# Altium PCB GPSR_v3.PcbDoc (part 1 of 2)
Units mil, origin at the board's own origin, x right, y up, seen from the top; angles counter-clockwise.
Board outline 2716.54 x 2700.39 mil, 4 copper layers (Top, GND2, VCC3, Bottom), stack 30.8 mil thick; 185 components, 126 nets, 538 pads, 295 vias.
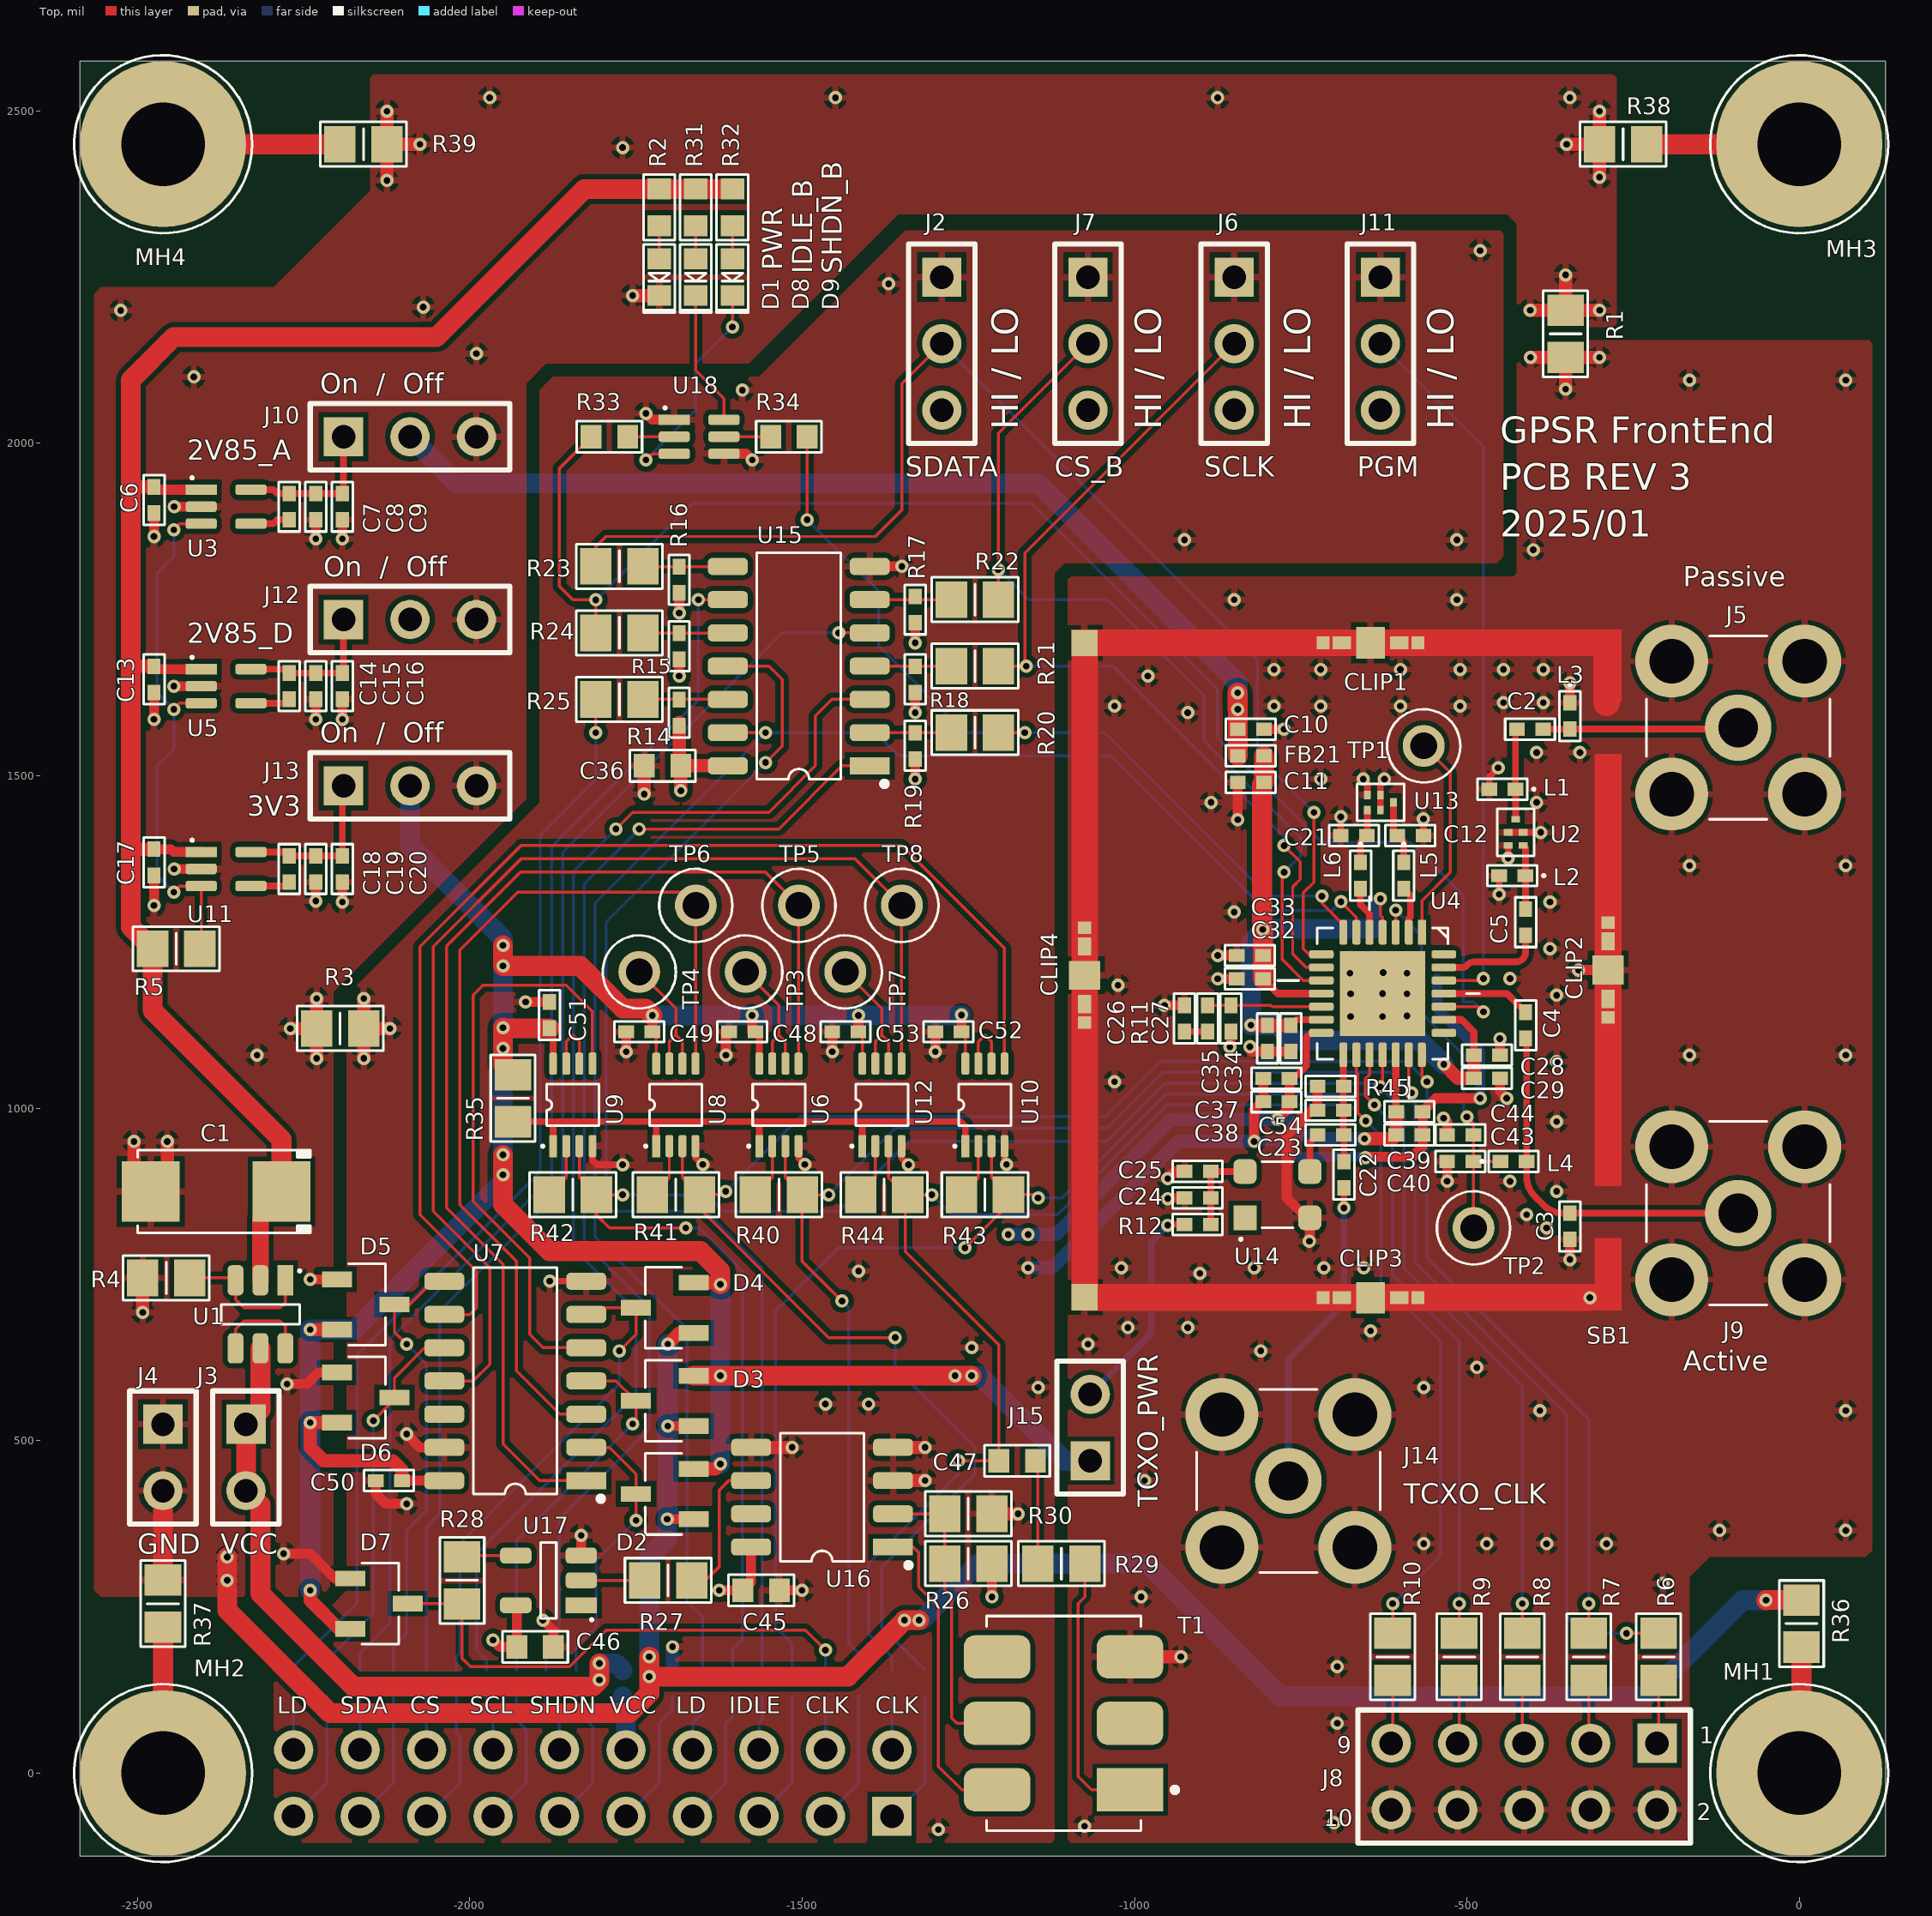
[diagram p0: Top view]
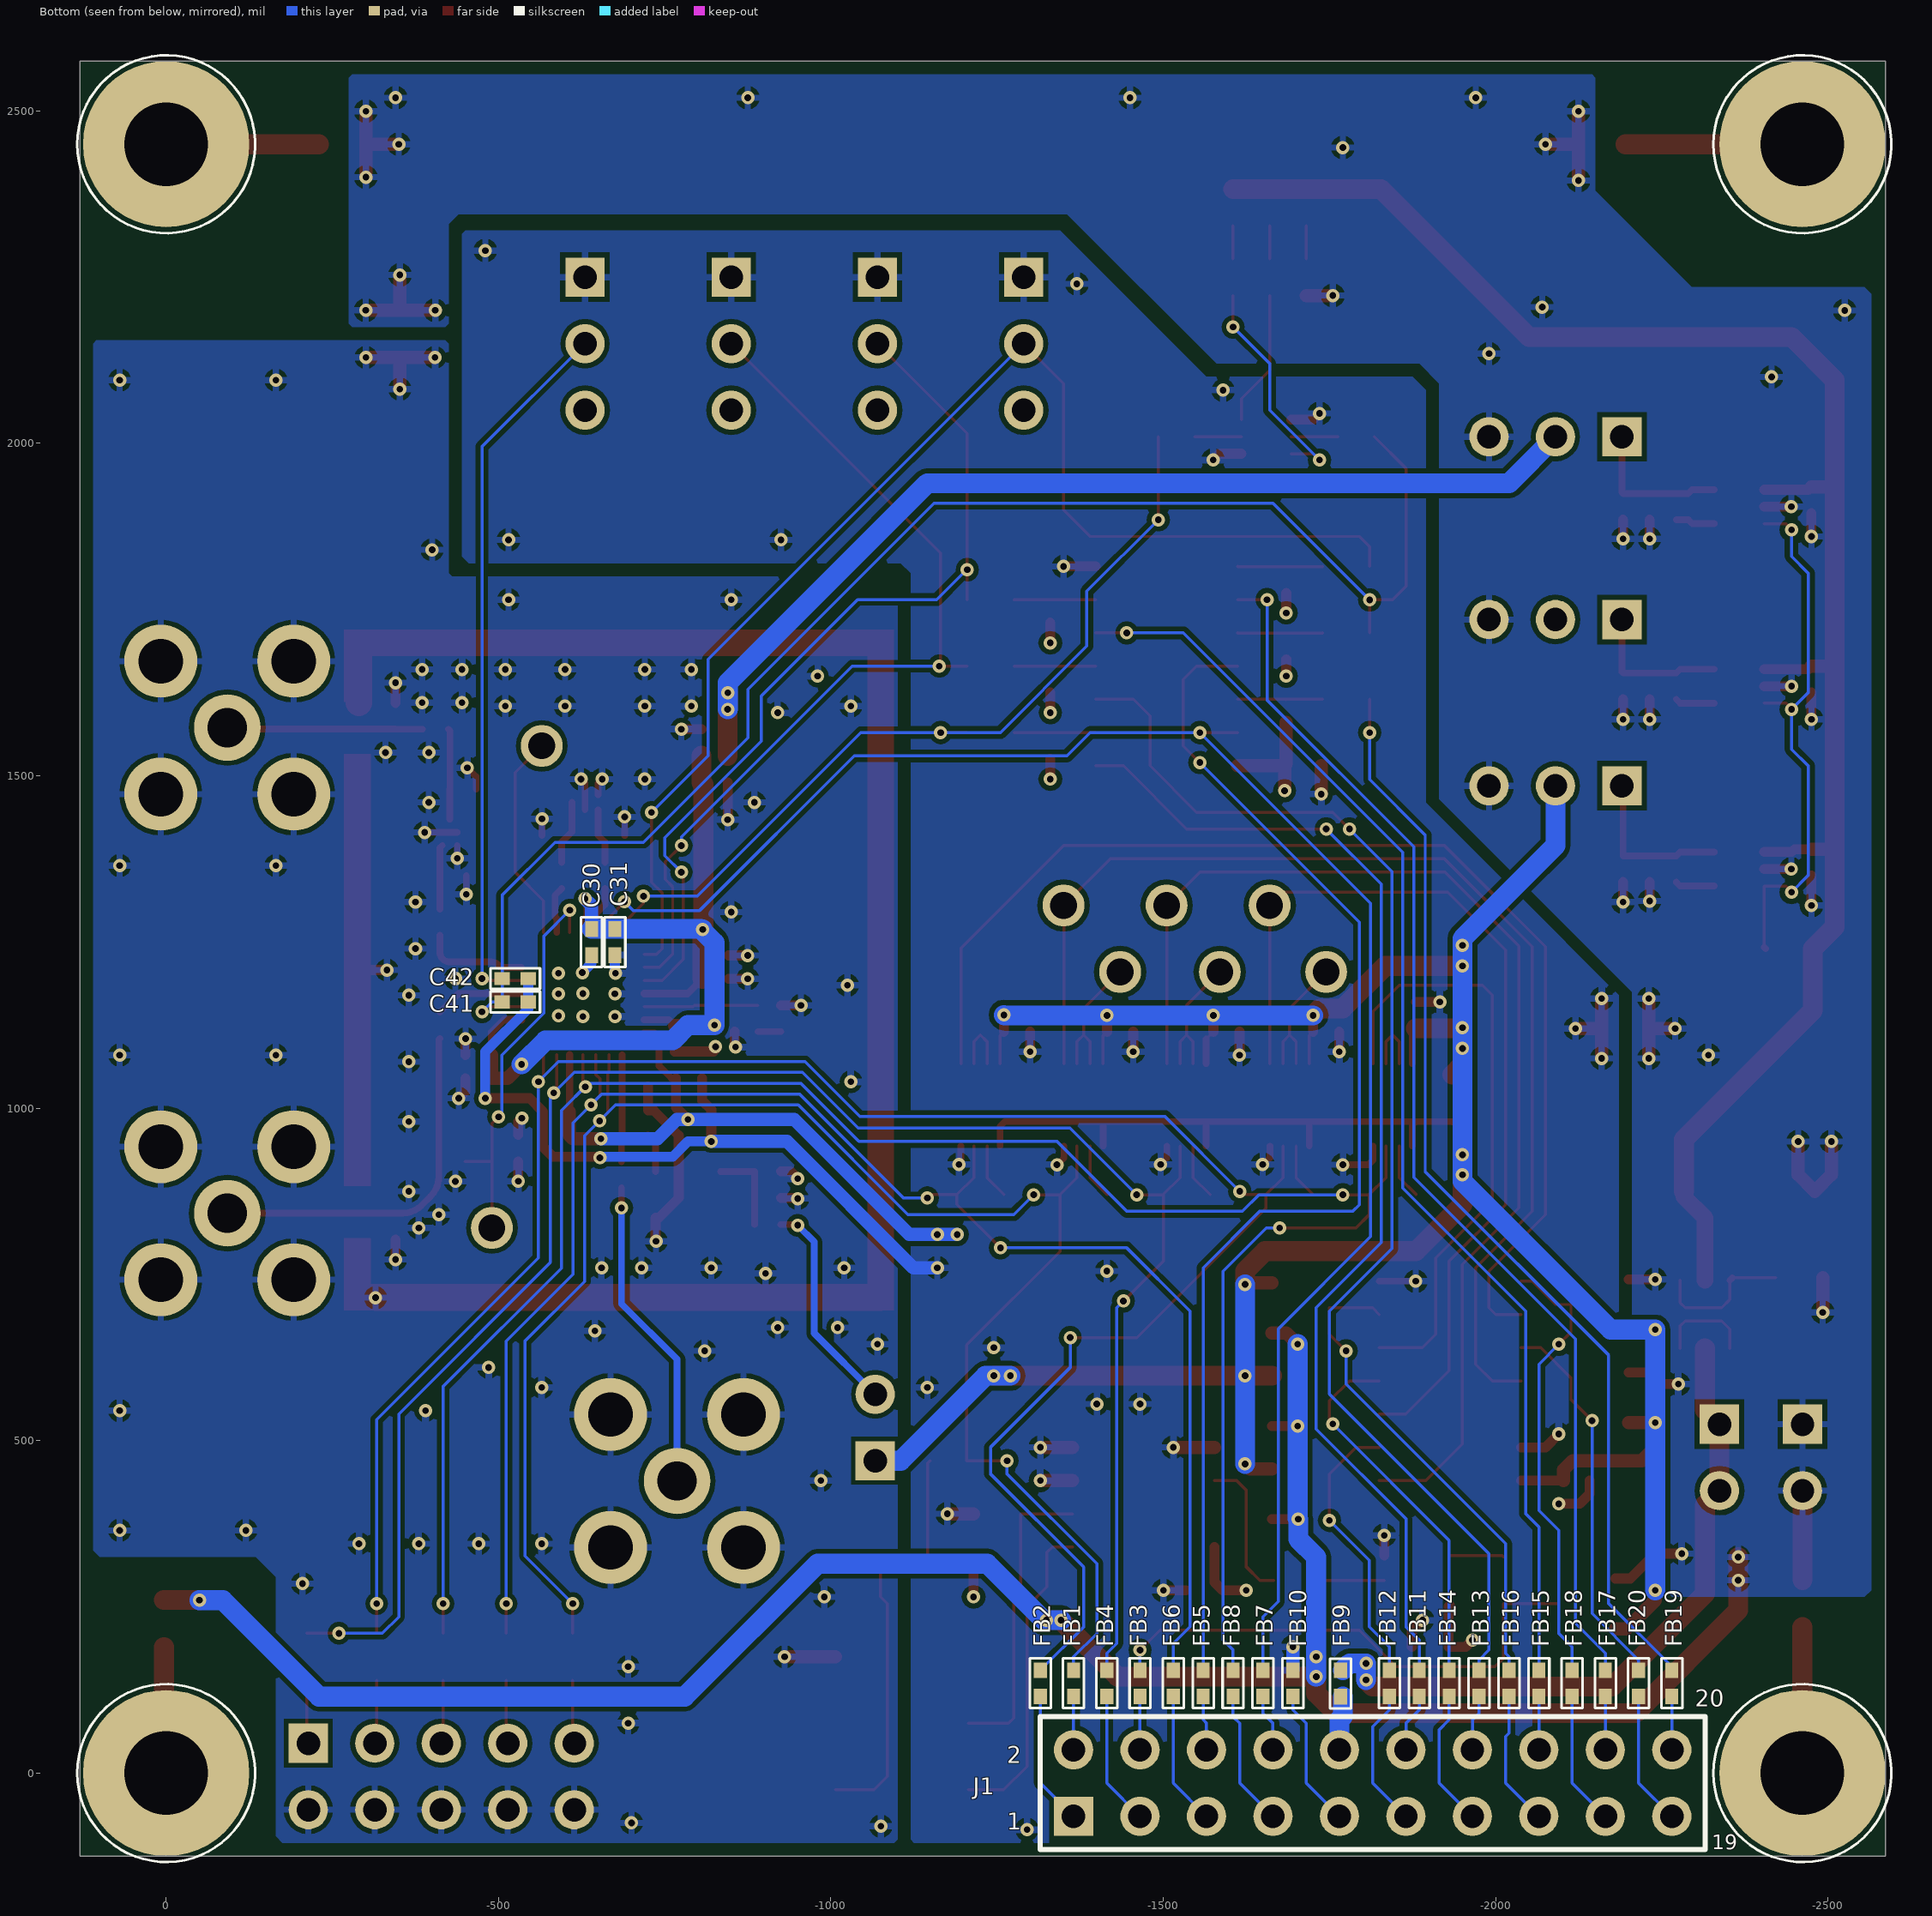
[diagram p1: Bottom view, seen from below]
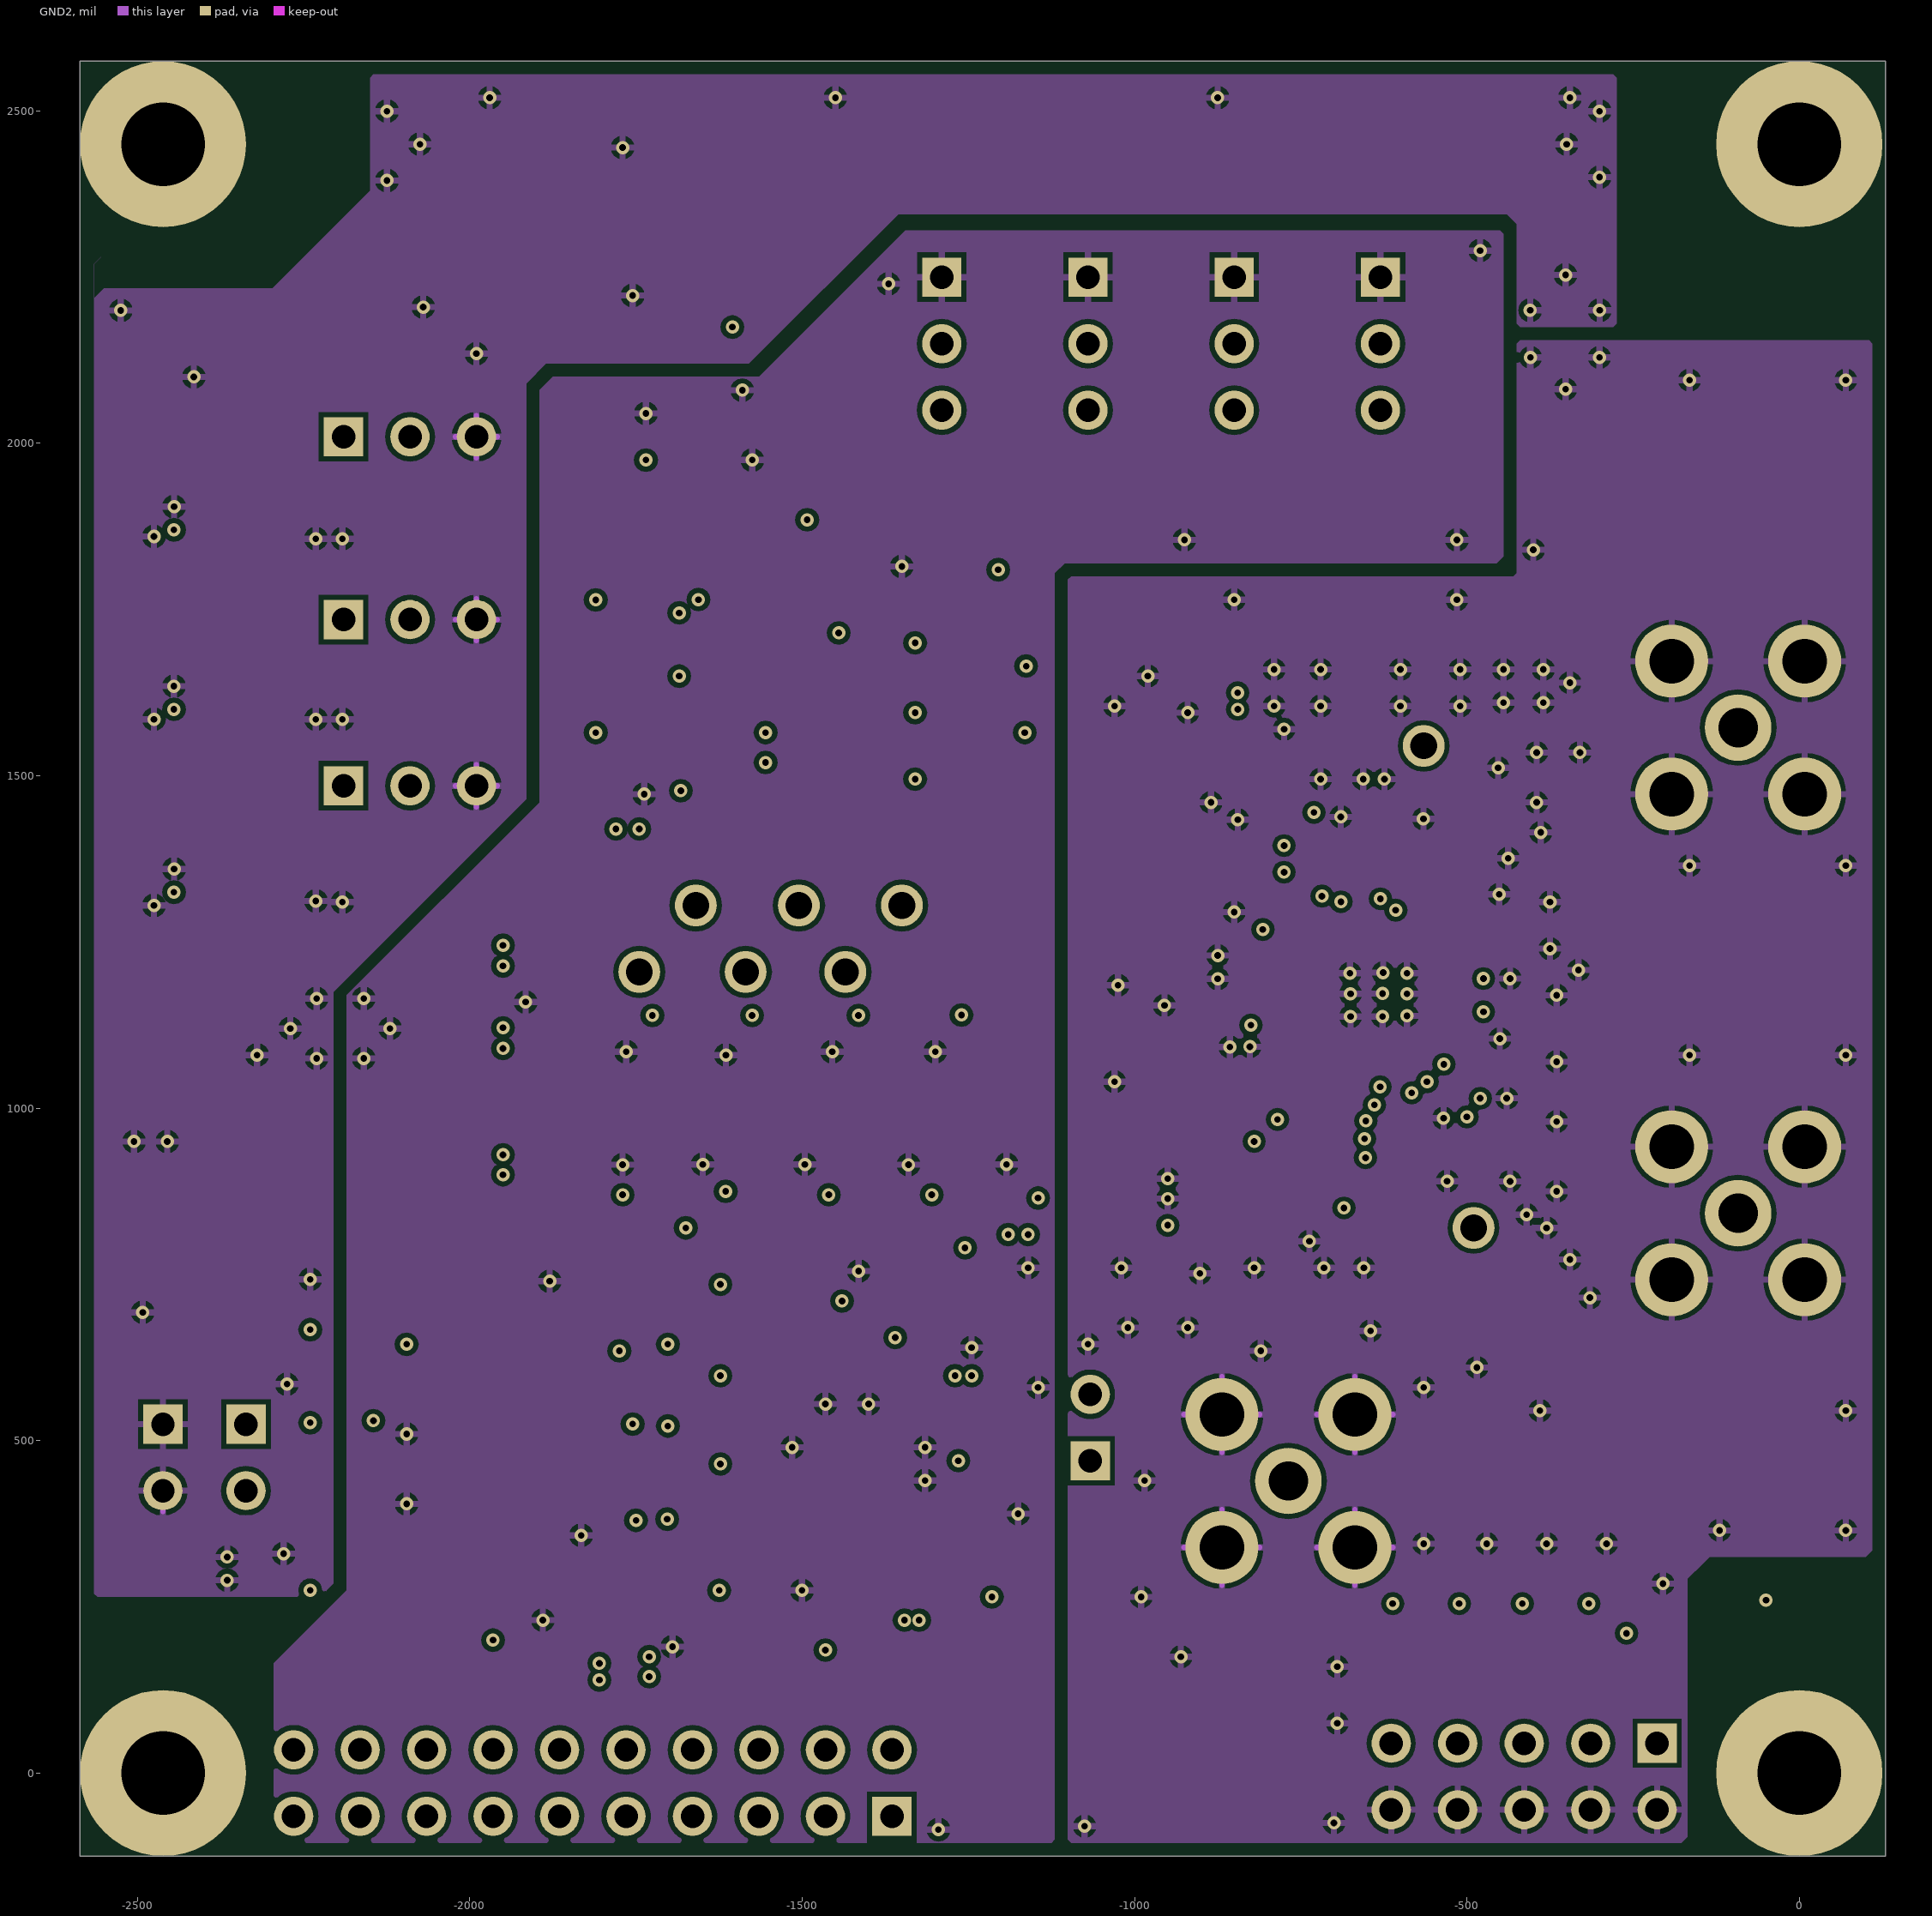
[diagram p2: GND2]
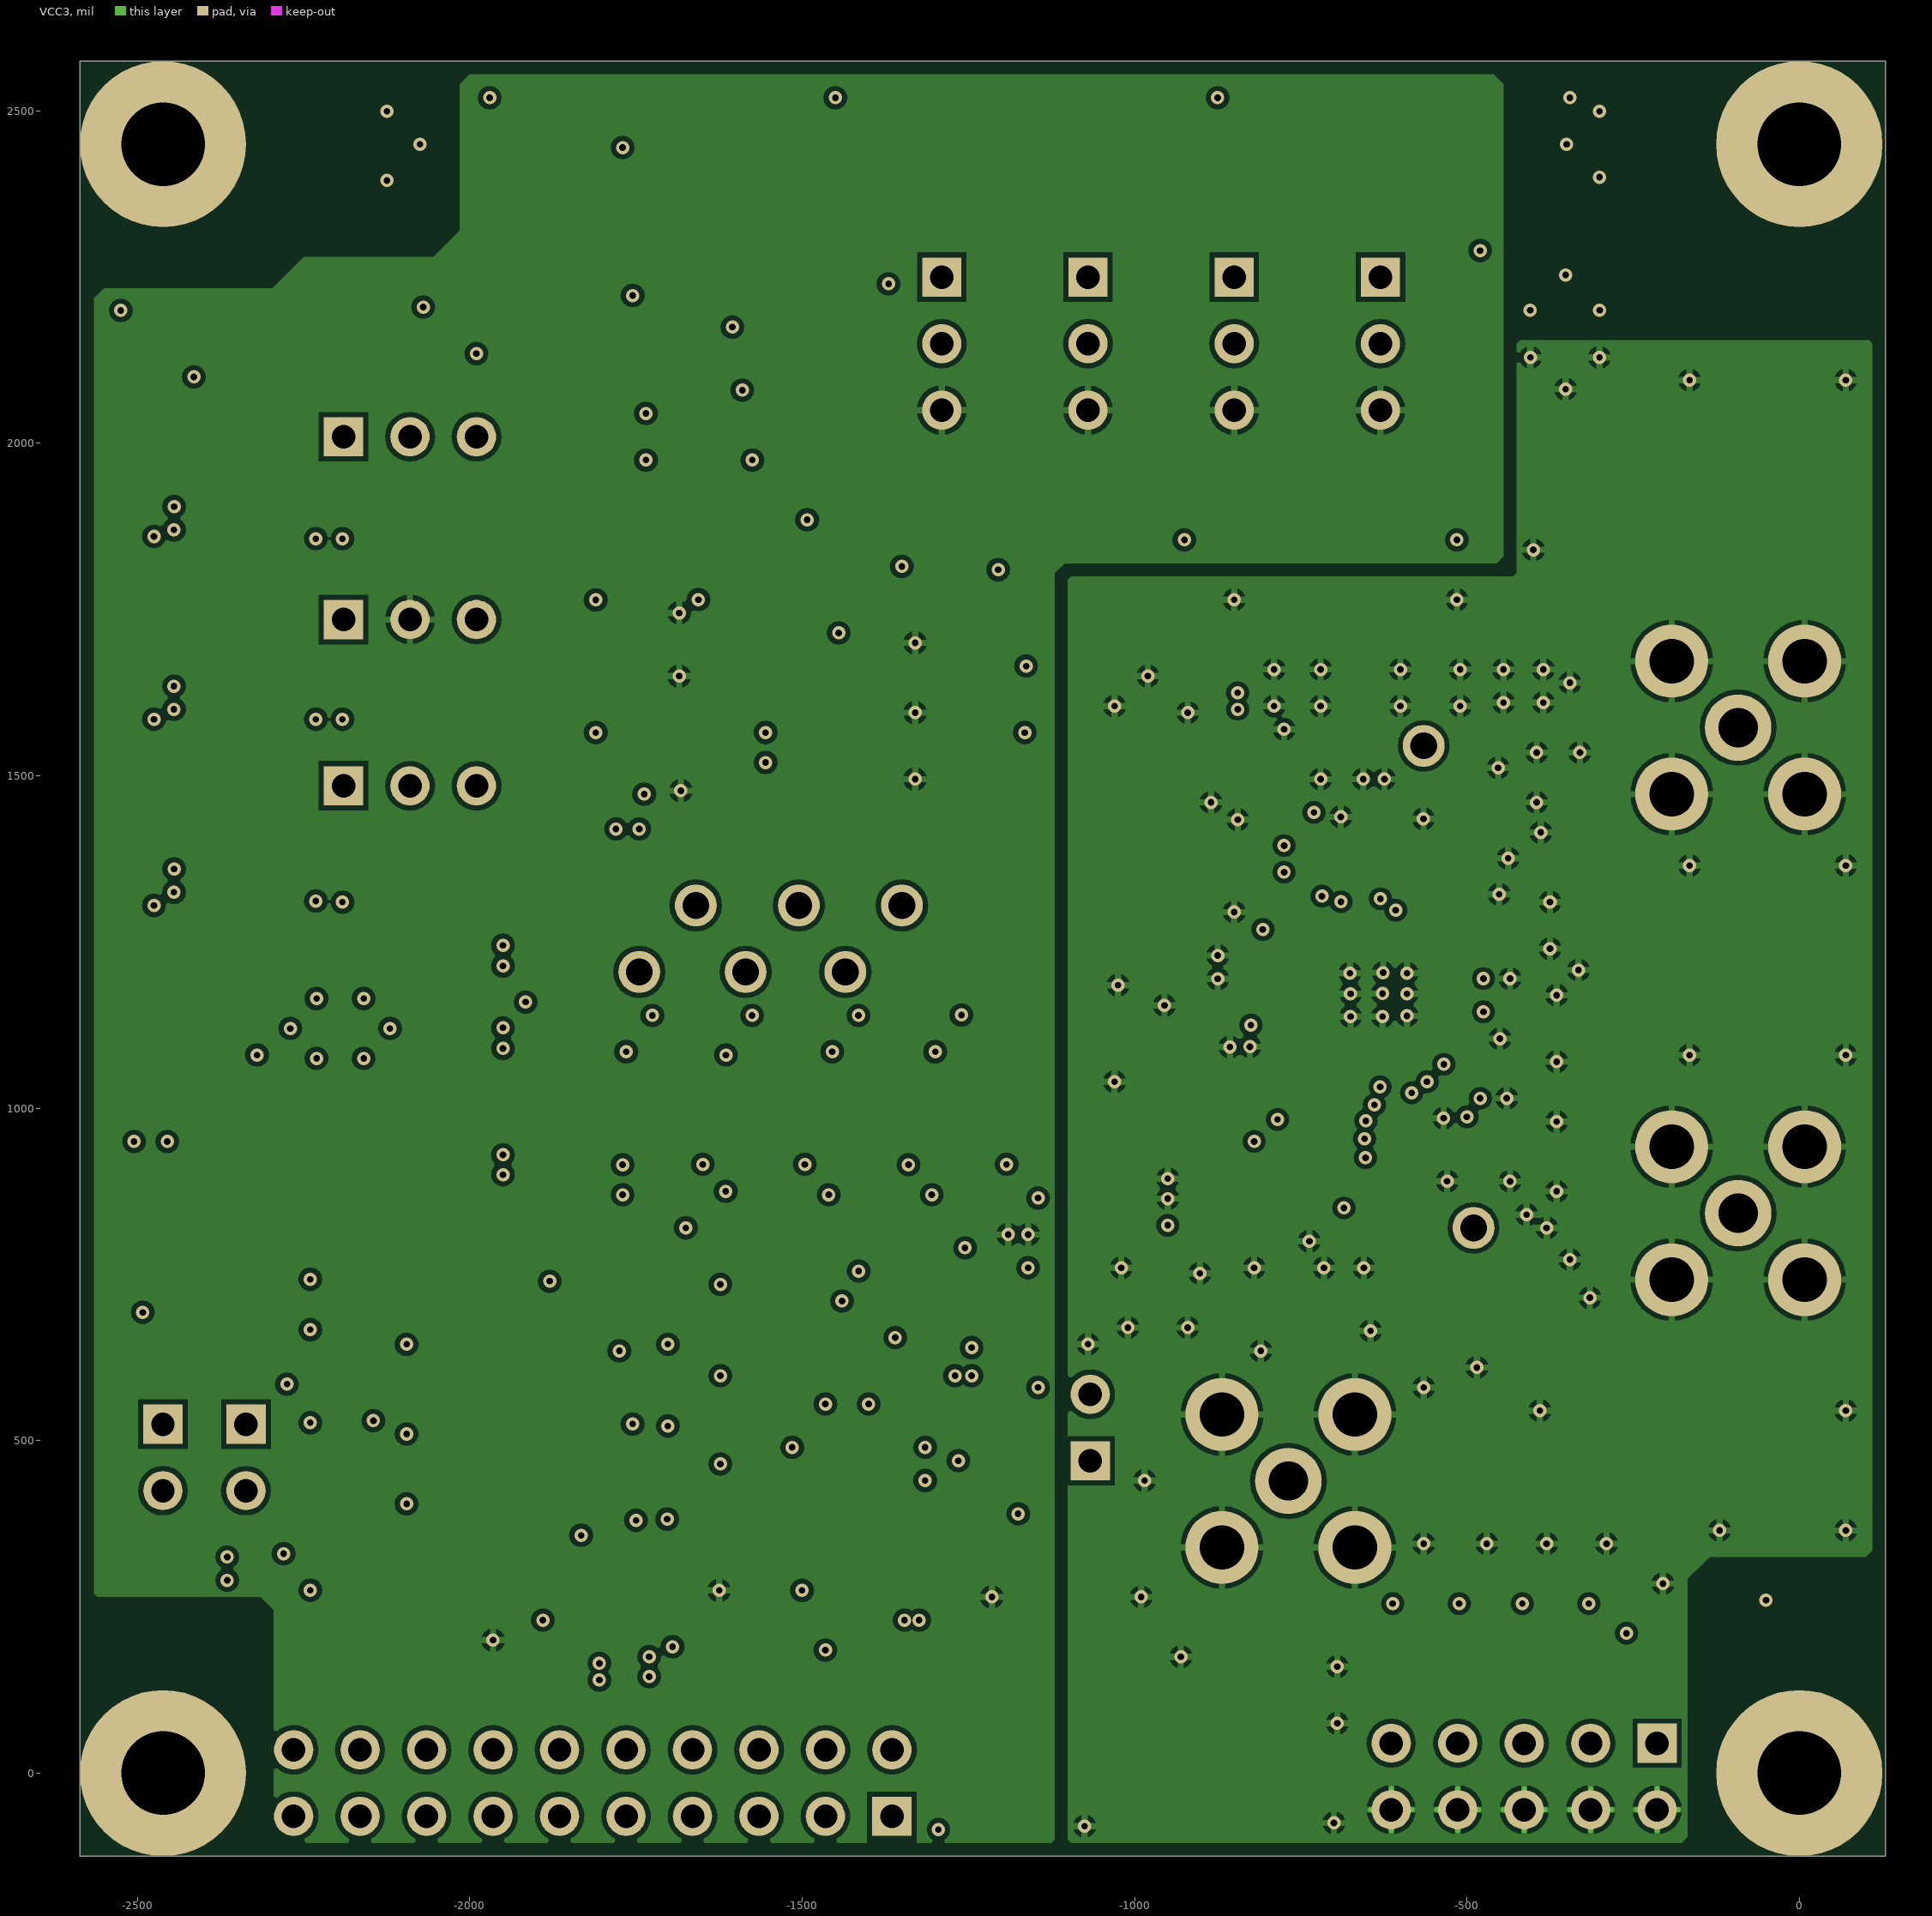
[diagram p3: VCC3]
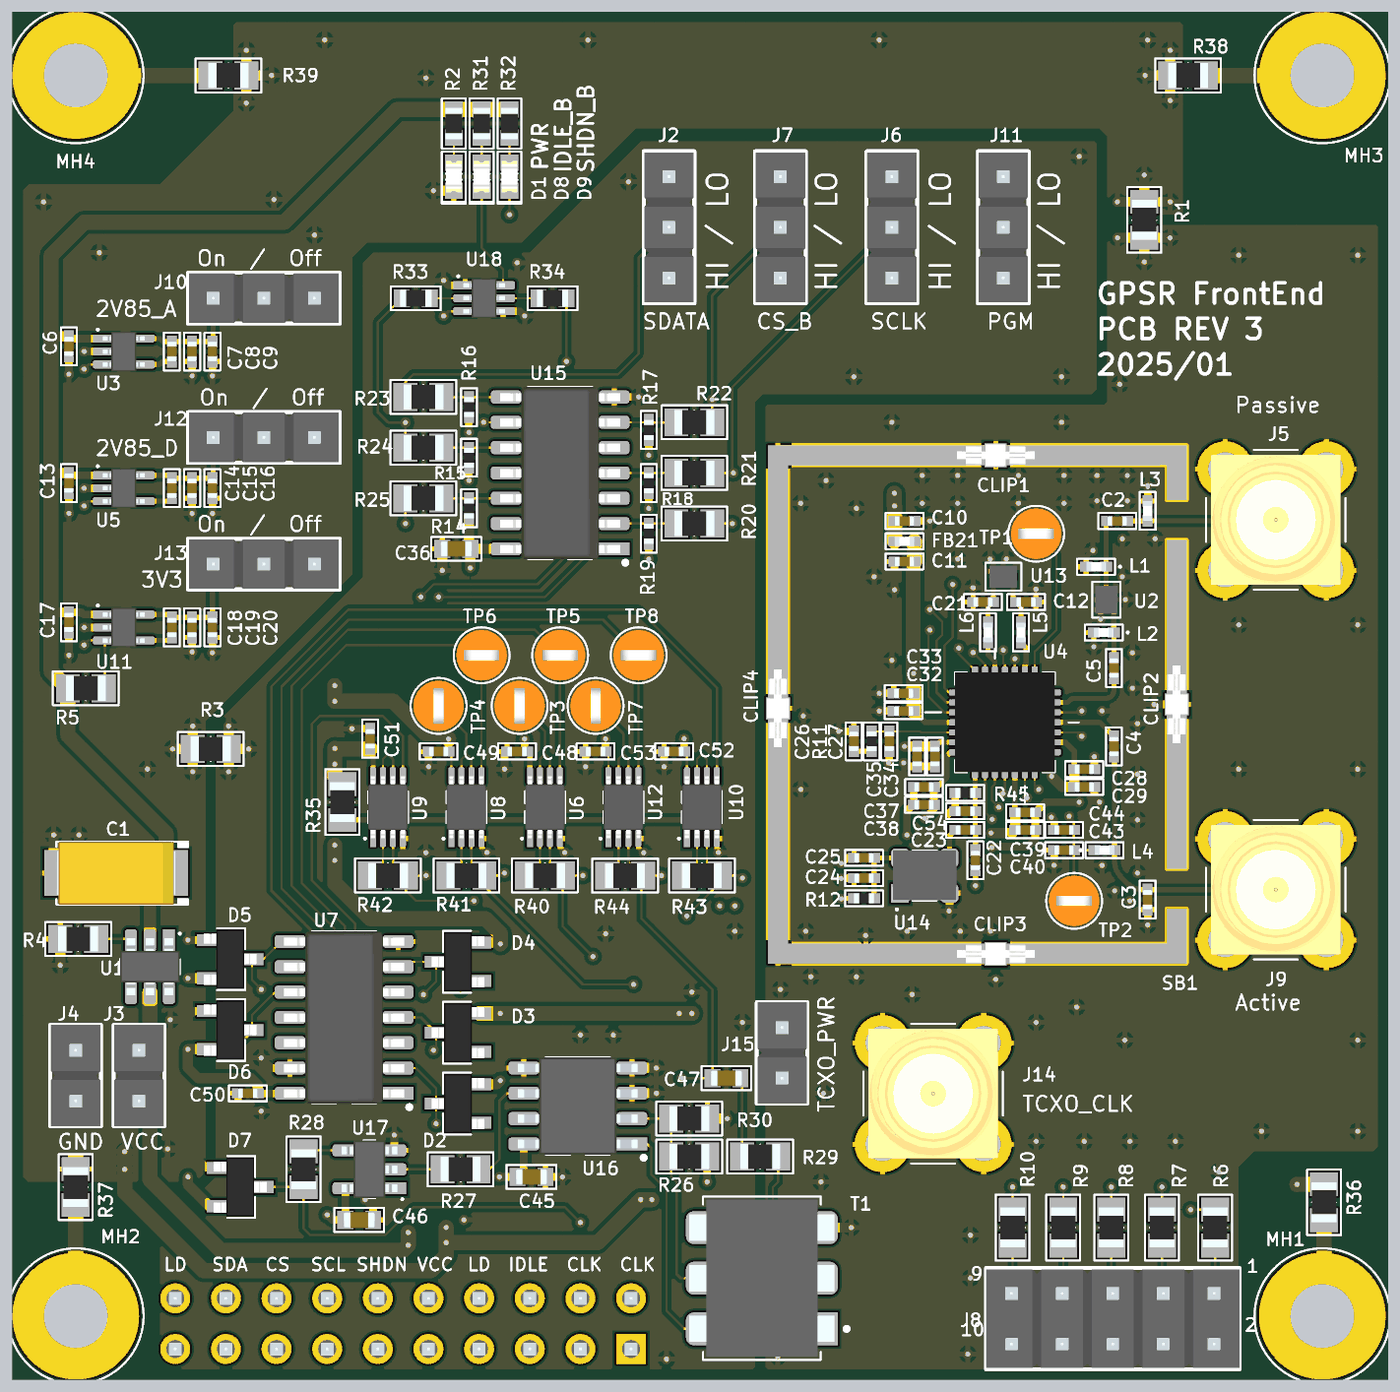
[diagram p5: 3D render of the assembled board from above, using the file's embedded part models]
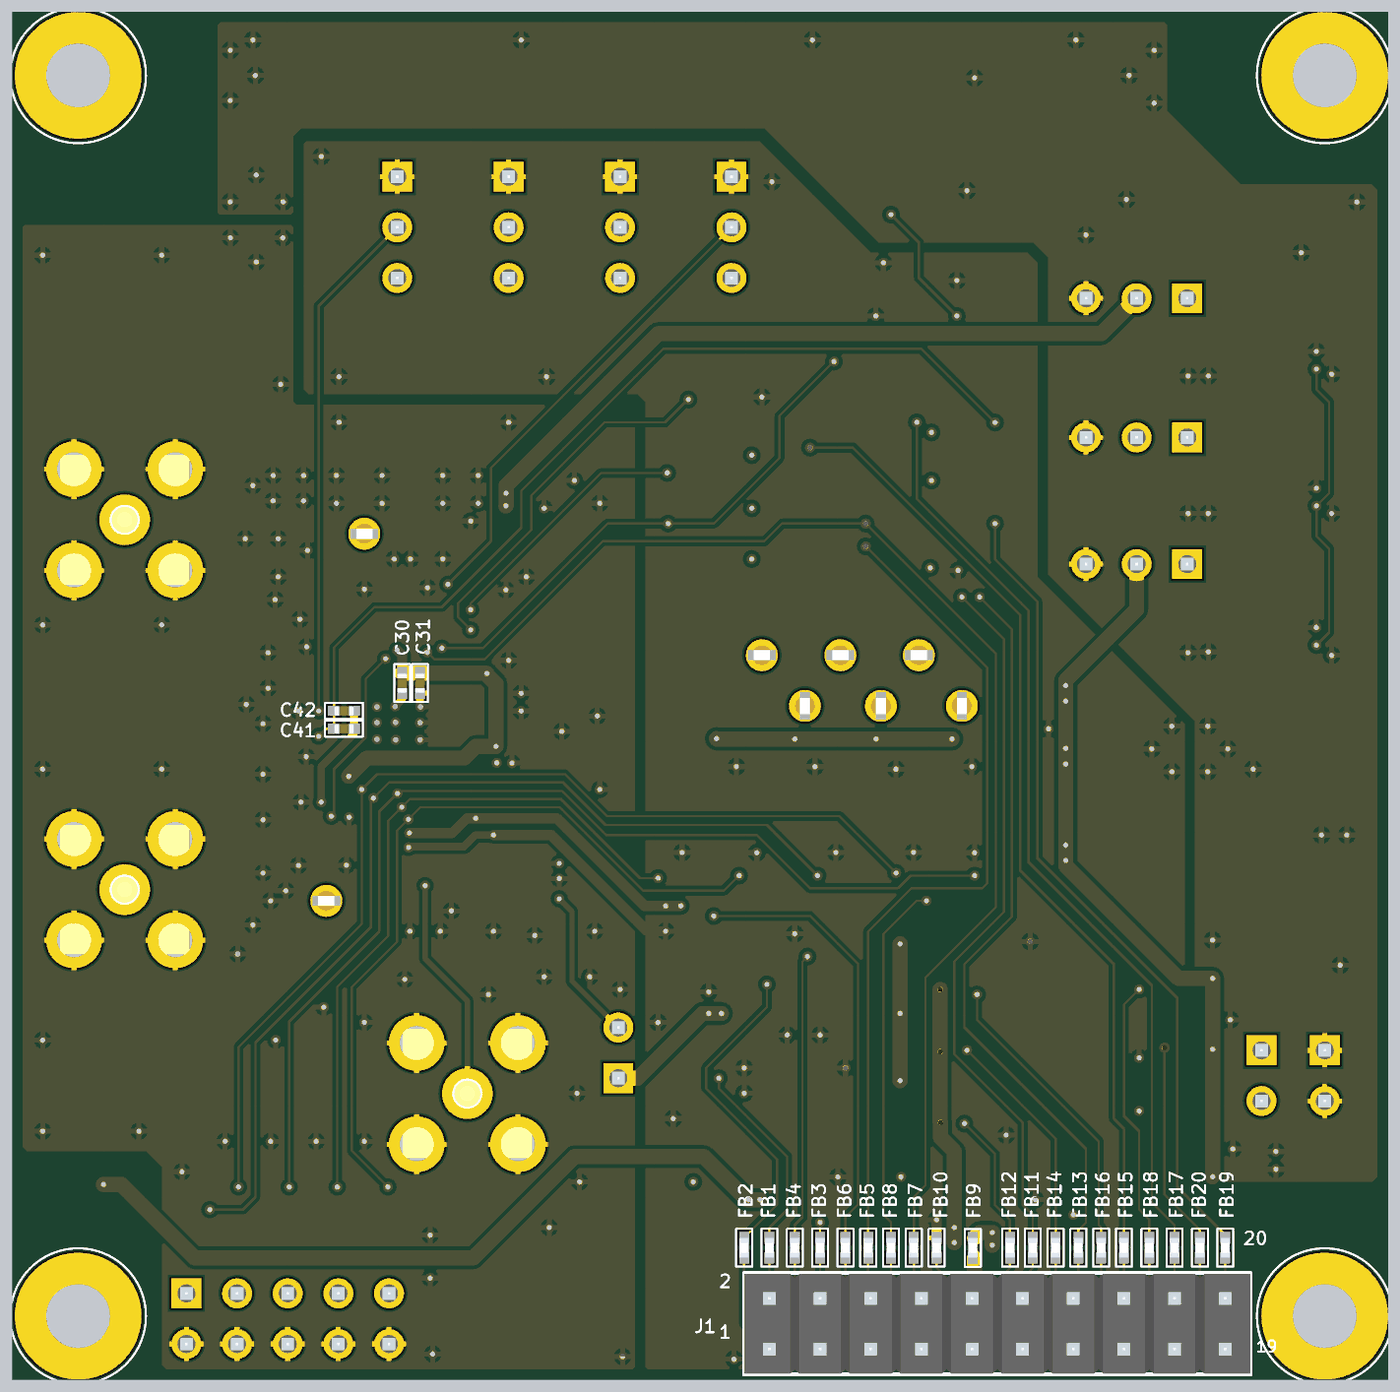
[diagram p6: 3D render of the assembled board from below, using the file's embedded part models]

## Layer stack, top to bottom
Top: signal copper 1.4
GND2: signal copper 1.4
Dielectric: prepreg 12.6, FR-4, Dk 4.8
VCC3: signal copper 1.4
Dielectric: core 12.6, FR-4, Dk 4.8
Bottom: signal copper 1.4

## Board outline
-2586.61,-125.2 129.92,-125.2 129.92,2575.2 -2586.61,2575.2

## Design rules (kind name [scope] priority, off if disabled: settings)
Clearance [All] p1: gap=7
ComponentClearance [All] p1 off: gap=10 collisioncheckmode=3 verticalgap=10 showdistances=FALSE
Height [All] p1 off: minheight=0 maxheight=1000 prefheight=500
HoleSize [All] p1: absolutevalues=TRUE maxlimit=200 minlimit=1 maxpercent=80.000 minpercent=20.000
MinimumSolderMaskSliver [All] p1 off: minsoldermaskwidth=10
PlaneConnect "Power Plane Connect Style - Round-oval thru-hole pad from global defaults" [IsPad And OnMultiLayer And (PadShape_MidLayer1 = 'Rounded Rectangle') And (PadXSize_MidLayer1 = PadYSize_MidLayer1) And (Pad_CornerRadius_MidLayer1 = '100%')] p2: planeconnectstyle=Relief reliefexpansion=20 reliefentries=4 reliefconductorwidth=10 reliefairgap=10
PlaneConnect "Power Plane Connect Style - Round-oval thru-hole pad from global defaults_1" [IsPad And OnMultiLayer And (PadShape_MidLayer1 = 'Rounded Rectangle') And (PadXSize_MidLayer1 = PadYSize_MidLayer1) And (Pad_CornerRadius_MidLayer1 = '100%')] p3: planeconnectstyle=Relief reliefexpansion=20 reliefentries=4 reliefconductorwidth=10 reliefairgap=10
PolygonConnect "Polygon Connect Style - Bottom Oval SMD from global defaults_1" [IsSMTPin And (PadShape_BottomLayer = 'Round') And (PadXSize_BottomLayer <> PADYSize_BottomLayer) vs Layer = 'Bottom'] p1: connectstyle=Relief reliefconductorwidth=10 reliefentries=4 polygonreliefangle="45 Angle"
PolygonConnect "Polygon Connect Style - Top Rect thru-hole pad from global defaults_1" [IsPad And OnMultiLayer And ((PadShape_TopLayer = 'Rectangular') Or (PadShape_TopLayer = 'Octagonal') Or (PadShape_TopLayer = 'Rounded Rectangle')) And (PadXSize_TopLayer <> PADYSize_TopLayer) vs Layer = 'Top'] p2: connectstyle=Relief reliefconductorwidth=10 reliefentries=4 polygonreliefangle="45 Angle"
PolygonConnect [All] p3: connectstyle=Relief reliefconductorwidth=10 reliefentries=4 polygonreliefangle="90 Angle"
RoutingVias [All] p1: holewidth=28 width=50 viastyle="Through Hole" minholewidth=28 minwidth=50 maxholewidth=28 maxwidth=50
SilkToSilkClearance [All] p1 off: silktosilkclearance=10
SilkscreenOverComponentPads [IsPad] p1 off: minsilkscreentomaskgap=10
SolderMaskExpansion [All] p1: expansion=4
Width [All] p1: maxlimit=50 minlimit=4.5 preferedwidth=10
22 further rules are at their usual default settings.

## Classes and differential pairs
component class GPSR_Main: C1 C2 C3 C4 C5 C6 C7 C8 C9 C10 C11 C12 C13 C14 C15 C16 C17 C18 C19 C20 C21 C22 C23 C24 C25 C26 C27 C28 C29 C30 C31 C32 C33 C34 C35 C36 C37 C38 C39 C40 C41 C42 C43 C44 C54 D1 FB1 FB2 FB3 FB4 FB5 FB6 FB7 FB8 FB9 FB10 FB11 FB12 FB13 FB14 FB15 FB16 FB17 FB18 FB19 FB20 FB21 J1 J2 J3 J4 J5 J6 J7 J8 J9 J10 J11 J12 J13 J14 J15 L1 L2 L3 L4 L5 L6 R1 R2 R3 R4 R5 R6 R7 R8 R9 R10 R11 R12 R14 R15 R16 R17 R18 R19 R20 R21 R22 R23 R24 R25 R45 TP1 TP2 TP3 TP4 TP5 TP6 TP7 TP8 U1 U2 U3 U4 U5 U6 U7 U8 U9 U10 U11 U12 U13 U14 U15
component class GPSR_Peripheral: C45 C46 C47 C48 C49 C50 C51 C52 C53 Clip1 Clip2 Clip3 Clip4 D2 D3 D4 D5 D6 D7 D8 D9 MH1 MH2 MH3 MH4 R26 R27 R28 R29 R30 R31 R32 R33 R34 R35 R36 R37 R38 R39 R40 R41 R42 R43 R44 SB1 T1 U16 U17 U18

## Components (designator, comment, footprint, x,y, rotation, side; value= is the part's Value field where it differs from the comment)
C1 "10uF" CAPPM6032X280N -2381.61,874.8 r180 top
C2 "100pF" C0402 -405,1570 r180 top
C3 "No Connection" C0402 -345,822.43 r90 top
C4 "100pF" C0402 -411.61,1124.8 r270 top
C5 "100pF" C0402 -411.61,1279.8 r90 top
C6 "1uF" C0402 -2475,1915 r90 top
C7 "0.1uF" C0402 -2271.61,1904.8 r90 top
C8 "1uF" C0402 -2231.61,1904.8 r90 top
C9 "10nF" C0402 -2191.61,1904.8 r90 top
C10 "1uF" C0402 -825,1570 r180 top
C11 "1uF" C0402 -825,1490 r0 top
C12 "No Connection" C0402 -585,1410 r0 top
C13 "1uF" C0402 -2475,1645 r90 top
C14 "0.1uF" C0402 -2271.61,1634.8 r90 top
C15 "1uF" C0402 -2231.61,1634.8 r90 top
C16 "10nF" C0402 -2191.61,1634.8 r90 top
C17 "1uF" C0402 -2475,1370 r90 top
C18 "0.1uF" C0402 -2271.61,1359.8 r90 top
C19 "1uF" C0402 -2231.61,1359.8 r90 top
C20 "10nF" C0402 -2191.61,1359.8 r90 top
C21 "No Connection" C0402 -670,1410 r180 top
C22 "10nF" C0402 -685,900 r270 top
C23 "10nF" C0402 -705,960 r180 top
C24 "10nF" C0402 -905,865 r0 top
C25 "0.1uF" C0402 -905,905 r0 top
C26 "0.47nF" C0402 -925,1135 r270 top
C27 "27pF" C0402 -855,1135 r90 top
C28 "0.1uF" C0402 -470,1080 r180 top
C29 "100pF" C0402 -470,1045 r180 top
C30 "0.1uF" C0402 -640,1250 r90 bottom
C31 "100pF" C0402 -675,1250 r90 bottom
C32 "0.1uF" C0402 -826.61,1194.8 r0 top
C33 "100pF" C0402 -826.61,1229.8 r0 top
C34 "0.1uF" C0402 -765,1105 r90 top
C35 "100pF" C0402 -800,1105 r90 top
C36 "0.1uF" C0603 -1710,1515 r180 top
C37 "0.1uF" C0402 -786.61,1044.8 r0 top
C38 "100pF" C0402 -786.61,1009.8 r0 top
C39 "0.1uF" C0402 -586.61,994.8 r180 top
C40 "100pF" C0402 -586.61,959.8 r180 top
C41 "0.1uF" C0402 -525,1160 r0 bottom
C42 "100pF" C0402 -525,1195 r0 bottom
C43 "0.1uF" C0402 -510,920 r0 top
C44 "100pF" C0402 -510,960 r0 top
C45 "0.1uF" C0603 -1561.61,274.8 r180 top
C46 "0.1uF" C0603 -1901.61,189.8 r180 top
C47 "10nF" C0603 -1176.61,469.8 r0 top
C48 "0.1uF" C0402 -1590,1115 r180 top
C49 "0.1uF" C0402 -1745,1115 r180 top
C50 "0.1uF" C0402 -2121.61,439.8 r180 top
C51 "0.1uF" C0402 -1880,1140 r90 top
C52 "0.1uF" C0402 -1280,1115 r180 top
C53 "0.1uF" C0402 -1435,1115 r180 top
C54 "10pF" C0402 -705,997 r0 top
CLIP1 "S0951-46R" S095146R -645,1700 r180 top
CLIP2 "S0951-46R" S095146R -287.6,1207.87 r90 top
CLIP3 "S0951-46R" S095146R -645,715 r180 top
CLIP4 "S0951-46R" S095146R -1075,1200 r90 top
D1 "D0603_LEDG" D0603 -1715,2250 r270 top
D2 "BAT54STA" SOT96P240X115-3N -1706.61,419.8 r180 top
D3 "BAT54STA" SOT96P240X115-3N -1706.61,559.8 r180 top
D4 "BAT54STA" SOT96P240X115-3N -1706.61,699.8 r180 top
D5 "BAT54STA" SOT96P240X115-3N -2156.61,704.8 r0 top
D6 "BAT54STA" SOT96P240X115-3N -2156.61,564.8 r0 top
D7 "BAT54STA" SOT96P240X115-3N -2136.61,254.8 r0 top
D8 "D0603_LEDG" D0603 -1660,2250 r270 top
D9 "D0603_LEDG" D0603 -1605,2250 r270 top
FB1 "FB0402_signal" FB0402 -1364.96,135 r270 bottom
FB2 "FB0402_signal" FB0402 -1315,135 r90 bottom
FB3 "FB0402_signal" FB0402 -1465,135 r270 bottom
FB4 "FB0402_signal" FB0402 -1415,135 r90 bottom
FB5 "FB0402_signal" FB0402 -1560,135 r270 bottom
FB6 "FB0402_signal" FB0402 -1515,135 r90 bottom
FB7 "FB0402_signal" FB0402 -1650,135 r270 bottom
FB8 "FB0402_signal" FB0402 -1605,135 r90 bottom
FB9 "FB0402_signal" FB0402 -1766.61,134.8 r270 bottom
FB10 "FB0402_signal" FB0402 -1695,135 r90 bottom
FB11 "FB0402_signal" FB0402 -1885,135 r270 bottom
FB12 "FB0402_signal" FB0402 -1840,135 r90 bottom
FB13 "FB0402_signal" FB0402 -1975,135 r270 bottom
FB14 "FB0402_signal" FB0402 -1930,135 r90 bottom
FB15 "FB0402_signal" FB0402 -2064.96,135 r270 bottom
FB16 "FB0402_signal" FB0402 -2020,135 r90 bottom
FB17 "FB0402_signal" FB0402 -2165,135 r270 bottom
FB18 "FB0402_signal" FB0402 -2115,135 r90 bottom
FB19 "FB0402_signal" FB0402 -2265,135 r270 bottom
FB20 "FB0402_signal" FB0402 -2215,135 r90 bottom
FB21 "FB0402_pwr" FB0402 -825,1530 r0 top
J1 "Female Header 10X2" HDR2X10 -1364.96,-64.96 r180 bottom locked
J2 "Header 1x3" HDR1X3 -1290,2250 r270 top
J3 "Header 1x2" HDR1X2 -2336.61,524.8 r270 top
J4 "Header 1x2" HDR1X2 -2461.61,524.8 r270 top
J5 "SMA Connector" SMA-JACK -91.89,1572.44 r0 top
J6 "Header 1x3" HDR1X3 -850,2250 r270 top
J7 "Header 1x3" HDR1X3 -1070,2250 r270 top
J8 "Header 5X2" HDR2X5 -213.78,44.88 r180 top locked
J9 "SMA Connector" SMA-JACK -91.89,842.12 r0 top
J10 "Header 1x3" HDR1X3 -2190,2010 r0 top
J11 "Header 1x3" HDR1X3 -630,2250 r270 top
J12 "Header 1x3" HDR1X3 -2190,1735 r0 top
J13 "Header 1x3" HDR1X3 -2190,1485 r0 top
J14 "SMA Connector" SMA-JACK -768.5,439.37 r0 top
J15 "Header 1x2" HDR1X2 -1066.61,469.8 r90 top
L1 "No Connection" L0402 -446.61,1479.8 r180 top
L2 "No Connection" L0402 -431.61,1349.8 r180 top
L3 "33nH" L0402 -345,1590 r270 top
L4 "33nH" L0402 -430,920 r0 top
L5 "Impedance Matching" L0402 -595,1350 r270 top
L6 "Impedance Matching" L0402 -660,1350 r270 top
MH1 "MHP3.2MM" MHP3.2MM 0,0 r0 top locked
MH2 "MHP3.2MM" MHP3.2MM -2461.42,0 r0 top
MH3 "MHP3.2MM" MHP3.2MM 0,2450 r0 top
MH4 "MHP3.2MM" MHP3.2MM -2461.42,2450 r0 top
R1 "0" R0805 -351.61,2164.8 r270 top
R2 "1k" R0603 -1715,2355 r270 top
R3 "0" R0805 -2195,1120 r0 top
R4 "10k" R0805 -2456.61,744.8 r0 top
R5 "0" R0805 -2441.61,1239.8 r180 top
R6 "0" R0805 -211.61,174.8 r270 top
R7 "0" R0805 -316.61,174.8 r270 top
R8 "0" R0805 -416.61,174.8 r270 top
R9 "0" R0805 -511.61,174.8 r270 top
R10 "0" R0805 -611.61,174.8 r270 top
R11 "20k" R0402 -890,1135 r90 top
R12 "22.1" R0402 -905,825 r180 top
R14 "10k" R0402 -1685,1595 r270 top
R15 "10k" R0402 -1685,1695 r270 top
R16 "10k" R0402 -1685,1795 r270 top
R17 "10k" R0402 -1330,1750 r270 top
R18 "10k" R0402 -1330,1645 r270 top
R19 "10k" R0402 -1330,1545 r270 top
R20 "0" R0805 -1240,1565 r180 top
R21 "0" R0805 -1240,1665 r180 top
R22 "0" R0805 -1240,1765 r180 top
R23 "0" R0805 -1775,1815 r0 top
R24 "0" R0805 -1775,1715 r0 top
R25 "0" R0805 -1775,1615 r0 top
R26 "5.1k" R0805 -1250,315 r0 top
R27 "0" R0805 -1701.61,289.8 r0 top
R28 "47" R0805 -2011.61,289.8 r270 top
R29 "0" R0805 -1110,315 r0 top
R30 "5.1k" R0805 -1250,390 r180 top
R31 "1k" R0603 -1660,2355 r90 top
R32 "1k" R0603 -1605,2355 r90 top
R33 "1k" R0603 -1790,2010 r0 top
R34 "1k" R0603 -1520,2010 r180 top
R35 "0" R0805 -1935,1015 r90 top
R36 "No Connection" R0805 3.39,224.8 r90 top
R37 "No Connection" R0805 -2461.61,254.8 r90 top
R38 "No Connection" R0805 -265,2450 r180 top
R39 "No Connection" R0805 -2160,2450 r0 top
R40 "No Connection" R0805 -1535,870 r180 top
R41 "No Connection" R0805 -1690,870 r180 top
R42 "No Connection" R0805 -1845,870 r180 top
R43 "No Connection" R0805 -1225,870 r180 top
R44 "No Connection" R0805 -1376.61,869.8 r180 top
R45 "10k" R0402 -705,1033 r0 top
SB1 "S02-25200300" S02-25200300 -1075,1700 r270 top locked
T1 "ADT1-6T+" ADT16T -1106.61,74.8 r90 top
TP1 "5006" 5115 -565,1545 r0 top
TP2 "5006" 5115 -490,820 r0 top
TP3 "5006" 5115 -1585,1205 r90 top
TP4 "5006" 5115 -1745,1205 r90 top
TP5 "5006" 5115 -1505,1305 r0 top
TP6 "5006" 5115 -1660,1305 r0 top
TP7 "5006" 5115 -1435,1205 r90 top
TP8 "5006" 5115 -1350,1305 r0 top
U1 "DMP2240UDM-7" SOT95P285X140-6N -2315,690 r270 top
U2 "SF14-1575F5UUA1" 5-SMD -426.61,1414.8 r0 top
U3 "MAX8510EXK29+T" SOT65P210X110-5N -2366.61,1904.8 r0 top
U4 "MAX2769ETI+T" QFN50P500X500X80-29N -626.77,1172.44 r270 top
U5 "MAX8510EXK29+T" SOT65P210X110-5N -2366.61,1634.8 r0 top
U6 "SN74LVC1404DCUR" SOP50P310X90-8N -1535,1005 r90 top
U7 "SN74LVC04ADR" SOIC127P600X175-14N -1931.61,589.8 r180 top
U8 "SN74LVC1404DCUR" SOP50P310X90-8N -1690,1005 r90 top
U9 "SN74LVC1404DCUR" SOP50P310X90-8N -1845,1005 r90 top
U10 "SN74LVC1404DCUR" SOP50P310X90-8N -1225,1005 r90 top
U11 "MAX8510EXK33+T" SOT65P210X110-5N -2366.61,1359.8 r0 top
U12 "SN74LVC1404DCUR" SOP50P310X90-8N -1380,1005 r90 top
U13 "RSF-1575.420-2000-1411-TR" 5-SMD -630,1460 r270 top
U14 "D32G-016.368M" OSC-3225-D32G -785,870 r0 top
U15 "SN74LV07ADR" SOIC127P600X175-14N -1505,1665 r180 top
U16 "MAX961ESA+" SOIC127P600X175-8N -1470,415 r180 top
U17 "SN74LV1T34DBVR" SOT95P280X145-5N -1881.61,289.8 r180 top
U18 "2N7002DW" SOT65P210X110-6N -1655,2010 r0 top

## Footprints (in the part's own frame and the unit in brackets; to place one, negate y for a bottom-side part, rotate by r counter-clockwise, add the part's x,y. Pads: shape width x height; smd on the part's side, far side on the other; paste and mask are expansions set on the pad)
5-SMD [mil] "5-SMD; 1.4 x 1.1 x 0.55 mm"
  rect 13x10 smd: 1(0,19.69) 2(-11.32,0) 3(-11.32,-19.69) 4(11.32,-19.69) 5(11.32,0)
  silkscreen extent -28,-35 28,35, body extent -22,-28 22,28, height 31
5115 [mm]
  round 1.6 hole 1.02: 1(0,0)
  silkscreen extent -1.4,-1.4 1.4,1.4, body extent -1.27,-1.27 1.27,1.27, height 4.57
ADT16T [mm]
  rect 1.65x2.54 smd: 1(-2.54,-2.54)
  rrect50% 1.65x2.54 smd: 2(0,-2.54) 3(2.54,-2.54) 4(2.54,2.54) 5(0,2.54) 6(-2.54,2.54)
  silkscreen extent -4.1,-4.35 4.1,2.95, body extent -3.93,-3.64 3.94,3.65, height 5.33
C0402 [mm] "Chip Capacitor, Body 1.0x0.5mm, IPC High Density"
  rect 0.6x0.5 smd: 1(-0.5,0) 2(0.5,0)
  silkscreen extent -0.95,-0.4 0.95,0.4, body extent -0.5,-0.25 0.5,0.25, height 0.56
C0603 [mm] "Chip Capacitor, Body 1.6x0.8mm, IPC High Density"
  rect 0.8x0.9 smd: 1(-0.7,0) 2(0.7,0)
  silkscreen extent -1.25,-0.6 1.25,0.6, body extent -0.8,-0.4 0.8,0.41, height 0.9
CAPPM6032X280N [mm]
  rect 2.2x2.3 smd: 1(-2.5,0) 2(2.5,0)
  silkscreen extent -3.6,-1.58 3,1.58, body extent -3,-1.58 3,1.58, height 2.8
D0603 [mm] "Chip Diode, Body 1.6x0.8mm, IPC High Density"
  rect 0.8x0.9 smd: 1(-0.7,0) 2(0.7,0)
  silkscreen extent -1.25,-0.6 1.4,0.6, body extent -0.8,-0.4 0.8,0.4, height 0.58
FB0402 [mm] "Chip Ferrite Bead, Body 1.0x0.5mm, IPC High Density"
  rect 0.6x0.5 smd: 1(-0.5,0) 2(0.5,0)
  silkscreen extent -0.95,-0.4 0.95,0.4, body extent -0.5,-0.25 0.5,0.25, height 0.5
HDR1X2 [mm] "Connector; Header; 2 Position"
  rect 1.5x1.5 hole 0.9: 1(0,0)
  round 1.5 hole 0.9: 2(2.54,0)
  silkscreen extent -1.27,-1.27 3.81,1.27, body extent -1.27,-1.24 3.81,1.24, height 8.38
HDR1X3 [mm] "Connector; Header; 3 Position"
  rect 1.5x1.5 hole 0.9: 1(0,0)
  round 1.5 hole 0.9: 2(2.54,0) 3(5.08,0)
  silkscreen extent -1.27,-1.27 6.35,1.27, body extent -1.21,-1.24 6.29,1.24, height 8.58
HDR2X5 [mm] "Connector; Header; 5x2 Position"
  rect 1.5x1.5 hole 0.9: 1(0,0)
  round 1.5 hole 0.9: 2(0,2.54) 3(2.54,0) 4(2.54,2.54) 5(5.08,0) 6(5.08,2.54) 7(7.62,0) 8(7.62,2.54) 9(10.16,0) 10(10.16,2.54)
  silkscreen extent -1.27,-1.27 11.43,3.81, body extent -1.27,-1.2 11.43,3.75, height 8.38
HDR2X10 [mm] "Connector; Header; 10x2 Position"
  rect 1.5x1.5 hole 0.9: 1(0,0)
  round 1.5 hole 0.9: 2(0,2.54) 3(2.54,0) 4(2.54,2.54) 5(5.08,0) 6(5.08,2.54) 7(7.62,0) 8(7.62,2.54) 9(10.16,0) 10(10.16,2.54) 11(12.7,0) 12(12.7,2.54) 13(15.24,0) 14(15.24,2.54) 15(17.78,0) 16(17.78,2.54) 17(20.32,0) 18(20.32,2.54) 19(22.86,0) 20(22.86,2.54)
  silkscreen extent -1.27,-1.27 24.13,3.81, body extent -1.27,-1.24 24.13,3.78, height 8.38
L0402 [mm] "Chip Inductor, Body 1.0x0.5mm, IPC High Density"
  rect 0.6x0.5 smd: 1(-0.5,0) 2(0.5,0)
  silkscreen extent -1.25,-0.4 0.95,0.4, body extent -0.5,-0.25 0.5,0.25, height 0.5
MHP3.2MM [mm] "Mounting Hole Plated 3.2mm"
  round 6.35 hole 3.2: 1(0,0)
  silkscreen extent -3.4,-3.4 3.4,3.4
OSC-3225-D32G [mm]
  rect 0.89x0.94 smd: 1(-1.24,-0.885)
  rrect50% 0.89x0.94 smd: 2(1.24,-0.885) 3(1.24,0.885) 4(-1.24,0.885)
  silkscreen extent -1.45,-1.75 0.6,1.26, body extent -1.61,-1.26 1.61,1.26, height 1.1
QFN50P500X500X80-29N [mil] "Small, 28-Pin, RoHS-Compliant, Thin QFN LeadFree Package (5mm x 5mm)"
  rect 37x12 smd: 1(-92.13,59.06)
  rrect50% 37x12 smd: 2(-92.13,39.37) 3(-92.13,19.69) 4(-92.13,0) 5(-92.13,-19.68) 6(-92.13,-39.37) 7(-92.13,-59.06) 15(92.13,-59.06) 16(92.13,-39.37) 17(92.13,-19.68) 18(92.13,0) 19(92.13,19.69) 20(92.13,39.37) 21(92.13,59.06)
  rrect50% 12x37 smd: 8(-59.06,-92.13) 9(-39.37,-92.13) 10(-19.69,-92.13) 11(0,-92.13) 12(19.69,-92.13) 13(39.37,-92.13) 14(59.06,-92.13) 22(59.06,92.13) 23(39.37,92.13) 24(19.69,92.13) 25(0,92.13) 26(-19.69,92.13) 27(-39.37,92.13) 28(-59.06,92.13)
  rect 128x128 smd: 29(0,0)
  silkscreen extent -146,-157 157,146, body extent -98,-98 98,98, height 30
R0402 [mm] "Chip Resistor, Body 1.0x0.5mm, IPC High Density"
  rect 0.6x0.5 smd: 1(-0.5,0) 2(0.5,0)
  silkscreen extent -0.95,-0.4 0.95,0.4, body extent -0.5,-0.25 0.5,0.25, height 0.4
R0603 [mm] "Chip Resistor, Body 1.6x0.8mm, IPC High Density"
  rect 0.8x0.9 smd: 1(-0.7,0) 2(0.7,0)
  silkscreen extent -1.25,-0.6 1.25,0.6, body extent -0.79,-0.42 0.79,0.43, height 0.5
R0805 [mm] "Chip Resistor, Body 2.0x1.2mm, IPC Medium Density"
  rect 1.2x1.4 smd: 1(-0.9,0) 2(0.9,0)
  silkscreen extent -1.65,-0.85 1.65,0.85, body extent -1,-0.62 1,0.63, height 0.6
S02-25200300 [mm]
  rect 1x1 smd: 1(0,0) 2(12.5,20) 3(25,0)
  Top region: 2.25,20.5 -0.5,20.5 -0.5,-0.5 25.5,-0.5 25.5,20.5 22.75,20.5 22.75,19.5 24.5,19.5 24.5,0.5 0.5,0.5 0.5,19.5 2.25,19.5
  Top region: 4.25,20.5 20.75,20.5 20.75,19.5 4.25,19.5
S095146R [mm]
  rect 0.48x0.5 smd: 1(-1.81,0) 5(1.81,0)
  rect 0.7x0.5 smd: 2(-1.1,0) 4(1.1,0)
  rect 1.1x1.2 smd: 3(0,0)
  body extent -1.95,-0.55 1.95,0.55, height 1.28
SMA-JACK [mil]
  round 100 hole 59: 1(0,0)
  round 110 hole 67: 2(-100,-100) 3(-100,100) 4(100,100) 5(100,-100)
  silkscreen extent -138,-138 138,138, body extent -128,-128 128,128, height 378
SOIC127P600X175-8N [mm]
  rect 1.525x0.65 smd: 1(-2.712,1.905)
  rrect50% 1.525x0.65 smd: 2(-2.712,0.635) 3(-2.712,-0.635) 4(-2.712,-1.905) 5(2.712,-1.905) 6(2.712,-0.635) 7(2.712,0.635) 8(2.712,1.905)
  silkscreen extent -3.4,-2.45 1.6,2.7, body extent -3,-2.45 3,2.45, height 1.75
SOIC127P600X175-14N [mm]
  rect 1.525x0.65 smd: 1(-2.712,3.81)
  rrect50% 1.525x0.65 smd: 2(-2.712,2.54) 3(-2.712,1.27) 4(-2.712,0) 5(-2.712,-1.27) 6(-2.712,-2.54) 7(-2.712,-3.81) 8(2.712,-3.81) 9(2.712,-2.54) 10(2.712,-1.27) 11(2.712,0) 12(2.712,1.27) 13(2.712,2.54) 14(2.712,3.81)
  silkscreen extent -3.37,-4.33 1.6,4.6, body extent -3.01,-4.32 3.01,4.34, height 1.75
SOP50P310X90-8N [mm]
  rect 0.85x0.3 smd: 1(-1.575,0.75)
  rrect50% 0.85x0.3 smd: 2(-1.575,0.25) 3(-1.575,-0.25) 4(-1.575,-0.75) 5(1.575,-0.75) 6(1.575,-0.25) 7(1.575,0.25) 8(1.575,0.75)
  silkscreen extent -1.62,-1 0.8,1.2, body extent -1.55,-1 1.55,1, height 0.77
SOT65P210X110-5N [mm]
  rect 1.2x0.4 smd: 1(-0.95,0.65)
  rrect50% 1.2x0.4 smd: 2(-0.95,0) 3(-0.95,-0.65) 4(0.95,-0.65) 5(0.95,0.65)
  silkscreen extent -1.35,1.05 -1.25,1.15, body extent -1.05,-1 1.05,1, height 1.1
SOT65P210X110-6N [mm]
  rect 1.2x0.4 smd: 1(-0.95,0.65)
  rrect50% 1.2x0.4 smd: 2(-0.95,0) 3(-0.95,-0.65) 4(0.95,-0.65) 5(0.95,0) 6(0.95,0.65)
  silkscreen extent -1.35,1.05 -1.25,1.15, body extent -1.05,-1 1.05,1, height 1.1
SOT95P280X145-5N [mm]
  rect 1.2x0.6 smd: 1(-1.25,0.95)
  rrect50% 1.2x0.6 smd: 2(-1.25,0) 3(-1.25,-0.95) 4(1.25,-0.95) 5(1.25,0.95)
  silkscreen extent -1.7,-1.45 0.3,1.55, body extent -1.4,-1.45 1.4,1.45, height 1.45
SOT95P285X140-6N [mm]
  rect 1.15x0.6 smd: 1(-1.3,0.95)
  rrect50% 1.15x0.6 smd: 2(-1.3,0) 3(-1.3,-0.95) 4(1.3,-0.95) 5(1.3,0) 6(1.3,0.95)
  silkscreen extent -1.71,-1.5 0.38,1.55, body extent -1.43,-1.5 1.43,1.5, height 1.4
SOT96P240X115-3N [mm]
  rect 1.15x0.6 smd: 1(1.1,0) 2(-1.1,-0.96) 3(-1.1,0.96)
  silkscreen extent -0.65,-1.55 0.75,1.55, body extent -1.33,-1.5 1.33,1.5, height 1.1

## Part data
C1: library part C2312_10u_TAJC, "Tantalum Capacitors - Solid SMD 35volts 10uF 10%"
C2 C4 C5 C29 C31 C33 C35 C38 C40 C42 C44: library part C0402_100p, "Capacitor"
C3 C12 C21: library part C0402_NC, "Capacitor"
C6 C8 C10 C11 C13 C15 C17 C19: library part C0402_1u, "Capacitor"
C7 C14 C18 C25 C28 C30 C32 C34 C37 C39 C41 C43 C48 C49 C50 C51 C52 C53: library part C0402_0.1u, "Capacitor"
C9 C16 C20 C22 C23 C24 C54: library part C0402_10n, "Capacitor"
C26: library part C0402_0.47n, "Capacitor"
C27: library part C0402_27p, "Capacitor"
C36 C45 C46: library part C0603_0.1u, "Capacitor"
C47: library part C0603_10n, "Capacitor"
CLIP1 CLIP2 CLIP3 CLIP4: "EMI Gaskets, Sheets, Absorbers & Shielding EMC Shield Can Clip 0.20MM Thick Cans"
D1 D8 D9: "LED, green"
D2 D3 D4 D5 D6 D7: "Schottky Diodes & Rectifiers Series 30V 200mA"
FB1 FB2 FB3 FB4 FB5 FB6 FB7 FB8 FB9 FB10 FB11 FB12 FB13 FB14 FB15 FB16 FB17 FB18 FB19 FB20: "Bead, signal"
FB21: "Bead, power"
J1: library part "Header 10X2", "Female Header, 10-Pin, Dual row"
J2 J6 J7 J10 J11 J12 J13: "Header, 3-Pin"
J3 J4 J15: "Header, 2-Pin"
J5 J9 J14: "RF Connectors / Coaxial Connectors SMA Coaxial Straight, 50Ω"
J8: "Header, 5-Pin, Dual row"
L1 L2: library part L0402_NC, "Inductor"
L3 L4: library part L0402_33n, "Inductor"
L5 L6: library part L0402_IM, "Inductor"
MH1 MH2 MH3 MH4: library part MHP3.2mm, "Mounting Hole Plated 3.2mm"
R1 R3 R5 R6 R7 R8 R9 R10 R20 R21 R22 R23 R24 R25 R27 R29 R35: library part R0805_0R, "Resistor"
R2 R31 R32 R33 R34: library part R0603_1k, "Resistor"
R4: library part R0805_10k, "Resistor"
R11: library part R0402_20K, "Resistor"
R12: library part R0402_22.1, "Resistor"
R14 R15 R16 R17 R18 R19 R45: library part R0402_10K, "Resistor"
R26 R30: library part R0805_5.1k, "Resistor"
R28: library part R0805_47R, "Resistor"
R36 R37 R38 R39 R40 R41 R42 R43 R44: library part R0805_NC, "Resistor"
SB1: "EMI Gaskets, Sheets, Absorbers & Shielding EMC Shield Can .2mm thick, 25X20X03"
T1: "Audio Transformers / Signal Transformers RF XFMR / SURF MOUNT / RoHS"
TP1 TP2 TP3 TP4 TP5 TP6 TP7 TP8: "Test Point"
U1: "MOSFETs Dual P-Channel"
U2: "Signal Conditioning SAW FILTER 1575MHz"
U3 U5: "LDO Voltage Regulators Ultra-Low-Noise, High PSRR, Low-Dropout, Vout=2.85V"
U4: "RF Receiver Universal GPS Receiver"
U6 U8 U9 U10 U12: "2-ch, 1.65-V to 5.5-V inverters with Schmitt-Trigger inputs"
U7: "Inverters Hex"
U11: "LDO Voltage Regulators Ultra-Low-Noise, High PSRR, Low-Dropout, Vout=3.3V"
U13: "FILTER SAW 1575.42MHZ 5SMD"
U14: "XTAL OSC TCXO 16.3680MHZ SNWV"
U15: "Buffers & Line Drivers Hex w/ HV Output"
U16: "Analog Comparators Single/Dual/Quad, Ultra-High-Speed, +3V"
U17: "Translation - Voltage Levels SGL Pwr Spply Buffer GATE CMOS"
U18: "MOSFETs N-Chan Enhancement Mode Field Effect"

## Via types
v1: diameter 20, hole 10, Top to Bottom, tented both sides, 295 vias

## Nets (pads, with @x,y where several pads share a name; then routed paths per layer and width w, separated by ;. In a path a pad name is that pad's centre, name@x,y a point inside that pad or via, vN(x,y) a via of type N, cw(c..) or ccw(c..) an arc to the next point about the centre after c; other vN are vias at no path point)
3V3: C48.1 C49.1 C50.1 C51.1 C52.1 C53.1 D2.2 D3.2 D4.2 D5.2 D6.2 D7.2 J13.2 J15.1 R35.2 U6.8 U7.14 U8.8 U9.8 U10.8 U12.8 | length 4619.4
  Top w4.5: C49.1@-1725.32,1115 -1719.53,1109.21 U8.8@-1719.53,1067.01 ; C48.1@-1575.32,1115 -1564.53,1104.21 ; C53.1@-1415.32,1115 -1409.53,1109.21 U12.8@-1409.53,1067.01 ; C52.1@-1260.32,1115 -1254.53,1109.21 U10.8@-1254.53,1067.01
  Top w10: C51.1@-1880,1120.32 -1874.53,1114.85 U9.8@-1874.53,1067.01 ; U6.8@-1564.53,1067.01 -1564.53,1104.21
  Top w15: C50.1@-2101.93,439.8 U7.14@-2038.39,439.8 ; C49.1@-1725.32,1115 v1(-1725.32,1139.68) ; C48.1@-1575.32,1115 v1(-1575.32,1139.68) ; C53.1@-1415.32,1115 v1(-1415.32,1139.68) ; C52.1@-1260.32,1115 v1(-1260.32,1140.32)
  Top w20: v1(-2240,275) -2240,260 -2197,217 D7.2@-2179.92,217.01 ; v1(-2240,667) D5.2@-2199.92,667.01 ; D6.2@-2199.92,527.01 v1(-2240,527) -2240,490 -2220,470 -2116.08,470 -2101.93,455.85 C50.1@-2101.93,439.8 ; D2.2@-1663.31,457.6 -1630.4,457.6 v1(-1623,465) ; D4.2@-1663.31,737.6 -1625.6,737.6 v1(-1623,735)
  Top w30: v1(-1950,930) v1(-1950,900) -1950,855 -1880,785 -1653,785 -1623,755 v1(-1623,735) ; v1(-1950,1245) v1(-1950,1214) -1834,1214 -1770,1150 -1735.64,1150 v1(-1725.32,1139.68) ; R35.2@-1935,1050.43 -1950,1065.43 v1(-1950,1090) v1(-1950,1121) -1949.32,1120.32 C51.1@-1880,1120.32 ; D3.2@-1663.31,597.6 v1(-1623,597.6) v1(-1270,597.6) v1(-1245,597.6)
  Bottom w30: v1(-2240,275) v1(-2240,527) v1(-2240,667) -2173,667 -1950,890 v1(-1950,900) v1(-1950,930) v1(-1950,1090) v1(-1950,1121) v1(-1950,1214) v1(-1950,1245) -1950,1255 -2090,1395 J13.2@-2090,1485 ; v1(-1725.32,1139.68) v1(-1575.32,1139.68) v1(-1415.32,1139.68) -1260.96,1139.68 v1(-1260.32,1140.32) ; v1(-1623,465) v1(-1623,597.6) v1(-1623,735) ; v1(-1270,597.6) v1(-1245,597.6) -1232.61,597.6 -1104.81,469.8 J15.1@-1066.61,469.8
AGND: C3.1 C10.1 C11.1 C12.2 C21.2 C24.1 C25.1 C26.1 C27.1 C28.1 C29.1 C30.1 C31.1 C32.1 C33.1 C34.1 C35.1 C43.1 C44.1 C54.1 CLIP1.1 CLIP1.2 CLIP1.3 CLIP1.4 CLIP1.5 CLIP2.1 CLIP2.2 CLIP2.3 CLIP2.4 CLIP2.5 CLIP3.1 CLIP3.2 CLIP3.3 CLIP3.4 CLIP3.5 CLIP4.1 CLIP4.2 CLIP4.3 CLIP4.4 CLIP4.5 J5.2 J5.3 J5.4 J5.5 J8.2 J8.4 J8.6 J8.8 J8.10 J9.2 J9.3 J9.4 J9.5 J14.2 J14.3 J14.4 J14.5 L1.2 L2.2 L3.1 R1.2 R45.1 SB1.1 SB1.2 SB1.3 T1.3 U2.2 U2.3 U2.5 U4.29 U13.2 U13.3 U13.5 U14.2 | length 9825.6
  Top w10: C21.2@-689.69,1410 v1(-689.69,1438.31) ; v1(-656,1495) -649.68,1488.68 U13.3@-649.69,1471.32 ; U13.5@-630,1448.68 -630,1489 v1(-624,1495) ; C12.2@-565.31,1410 v1(-565.31,1435.31) ; L1.2@-466.3,1479.8 -466.3,1498.7 v1(-453,1512) ; v1(-451.3,1321.7) L2.2@-451.3,1349.8 ; v1(-437.93,1376.07) U2.3@-437.93,1395.12 ; U2.2@-437.93,1414.8 v1(-389,1414.8)
  Top w15: v1(-955,1154.68) C26.1@-925,1154.69 ; v1(-950,864) -949,865 C24.1@-924.69,865 ; v1(-950,894) -939,905 C25.1@-924.69,905 ; v1(-874.8,1194.8) C32.1@-846.3,1194.8 ; v1(-874.8,1229.8) C33.1@-846.3,1229.8 ; v1(-856.5,1092) -856.5,1091.5 -855,1090 C27.1@-855,1115.32 ; v1(-844.68,1434) C11.1@-844.69,1490 ; v1(-826.5,1092.5) -826.5,1090 -828,1090 -823.32,1085.32 C34.1@-765,1085.32 ; C10.1@-805.32,1570 v1(-775,1570) ; v1(-737,800) -736.18,800.82 U14.2@-736.18,835.16 -741.16,835.16 -771,865 -771,959 -733,997 C54.1@-724.69,997 R45.1@-724.69,1033 ; v1(-535,985) -529.68,979.68 C44.1@-529.69,960 ; v1(-529.68,890.32) C43.1@-529.69,920 ; C29.1@-450.32,1045 -450.32,1025.32 v1(-440,1015) ; C28.1@-450.32,1080 v1(-450.32,1104.68) ; v1(-345,772.43) C3.1@-345,802.75 ; L3.1@-345,1609.69 v1(-345,1640) ; v1(-332.13,1207.87) SB1.2@-287.6,1207.87 ; CLIP2.1@-287.6,1136.61 SB1.2@-287.6,1207.87 ; CLIP2.5@-287.6,1279.13 SB1.2@-287.6,1207.87
  Top w20: T1.3@-1006.61,174.8 v1(-930.2,174.8) ; v1(-404.37,2129.37) R1.2@-351.61,2129.37 ; v1(-351.61,2081.61) R1.2@-351.61,2129.37 ; v1(-300.63,2129.37) R1.2@-351.61,2129.37
  Top w40: CLIP4.1@-1075,1128.74 SB1.3@-1075,715.75 ; CLIP4.2@-1075,1156.69 SB1.3@-1075,715.75 ; CLIP3.5@-716.26,715 SB1.3@-1074.25,715 ; CLIP1.5@-716.26,1700 SB1.1@-1075,1700 ; CLIP3.4@-688.31,715 SB1.3@-1074.25,715 ; CLIP1.4@-688.31,1700 SB1.1@-1075,1700 ; CLIP3.3@-645,715 SB1.3@-1074.25,715 ; CLIP1.3@-645,1700 SB1.1@-1075,1700 ; CLIP3.2@-601.69,715 SB1.3@-1074.25,715 ; CLIP1.2@-601.69,1700 SB1.1@-1075,1700 ; v1(-315,715) SB1.3@-1074.25,715 ; -290,1610 -290,1700 SB1.1@-1075,1700 ; SB1.3@-1075,715.75 SB1.3@-1074.25,715 ; SB1.3@-1075,715.75 SB1.1@-1075,1700
  GND2 w8: -925.52,339.37 J14.2@-868.5,339.37 ; -925.52,539.37 J14.3@-868.5,539.37 ; -868.5,282.35 J14.2@-868.5,339.37 ; -868.5,396.39 J14.2@-868.5,339.37 ; -868.5,482.35 J14.3@-868.5,539.37 ; -868.5,596.39 J14.3@-868.5,539.37 ; -811.48,339.37 J14.2@-868.5,339.37 ; -811.48,539.37 J14.3@-868.5,539.37 ; -725.52,339.37 J14.5@-668.5,339.37 ; -725.52,539.37 J14.4@-668.5,539.37 ; -668.5,282.35 J14.5@-668.5,339.37 ; -668.5,396.39 J14.5@-668.5,339.37 ; -668.5,482.35 J14.4@-668.5,539.37 ; -668.5,596.39 J14.4@-668.5,539.37 ; -611.48,339.37 J14.5@-668.5,339.37 ; -611.48,539.37 J14.4@-668.5,539.37
  VCC3 w8: -645.33,-55.12 J8.10@-613.78,-55.12 ; -613.78,-86.67 J8.10@-613.78,-55.12 ; -613.78,-23.57 J8.10@-613.78,-55.12 ; -582.23,-55.12 J8.10@-613.78,-55.12 ; -545.33,-55.12 J8.8@-513.78,-55.12 ; -513.78,-86.67 J8.8@-513.78,-55.12 ; -513.78,-23.57 J8.8@-513.78,-55.12 ; -482.23,-55.12 J8.8@-513.78,-55.12 ; -445.33,-55.12 J8.6@-413.78,-55.12 ; -413.78,-86.67 J8.6@-413.78,-55.12 ; -413.78,-23.57 J8.6@-413.78,-55.12 ; -382.23,-55.12 J8.6@-413.78,-55.12 ; -345.33,-55.12 J8.4@-313.78,-55.12 ; -313.78,-86.67 J8.4@-313.78,-55.12 ; -313.78,-23.57 J8.4@-313.78,-55.12 ; -282.23,-55.12 J8.4@-313.78,-55.12 ; -245.33,-55.12 J8.2@-213.78,-55.12 ; -213.78,-86.67 J8.2@-213.78,-55.12 ; -213.78,-23.57 J8.2@-213.78,-55.12 ; -182.23,-55.12 J8.2@-213.78,-55.12
  Bottom w15: v1(-676,1203) -675,1204 C31.1@-675,1230.32 ; C30.1@-640,1230.32 -640,1218 v1(-626,1204)
  other v1: -1075,-80 -700,-75 -695,75 -695,160 -990,265 -205,285 -565,345 -470,345 -380,345 -290,345 -120,365 70,365 -985,440 -390,545 70,545 -565,580 -485,610 -810,635 -1070,645 -645,665 -1010,670 -920,670 -901.61,751.61 -1020,760 -820,760 -715,760 -655,760 -380,820 -410,840 -365,875 -435,890 -365,980 -1030,1040 -365,1070 -165,1080 70,1080 -675,1138 -627,1138 -590,1139 -365,1170 -675,1172 -590,1172 -626.77,1172.44 -1025,1185 -435,1195 -590,1203 -375,1240 -850,1295 -375,1310 -165,1365 70,1365 -885,1460 -395,1460 -720,1495 -395,1535 -330,1535 -920,1595 -1030,1605 -790,1605 -720,1605 -600,1605 -510,1605 -445,1610 -385,1610 -980,1650 -790,1660 -720,1660 -600,1660 -510,1660 -445,1660 -385,1660 -850,1765 -515,1765 -400,1840 -165,2095 70,2095
ANT_BIAS: C43.2 C44.2 L4.1 TP2.1 U4.3 | length 600.6
  Top w4.5: U4.3@-607.09,1264.57 v1(-607.09,1298) ; v1(-500,987) -490.31,977.31 C43.2@-490.31,920 ; TP2.1@-490,820 -490.31,820.31 C43.2@-490.31,920 ; L4.1@-449.69,920 C43.2@-490.31,920
  Bottom w4.5: v1(-607.09,1298) -568,1258.91 -568,1143 -505,1080 -505,992 v1(-500,987)
CLK_BUF: D7.1 FB3.1 R28.2 | length 781
  Top w4.5: D7.1@-2093.31,254.8 -2012.04,254.8 R28.2@-2011.61,254.37 -2011.61,172.61 -1999,160 -1850,160 -1795,215 -1495,215 v1(-1465,185)
  Bottom w4.5: FB3.1@-1465,154.69 v1(-1465,185)
CLK_OUT: C47.1 FB1.1 R10.1 R44.1 U4.16 U12.3 | length 2724
  Top w4.5: U12.3@-1370.16,942.99 -1370.16,895.59 R44.1@-1344.57,870 ; v1(-1305,869.8) -1344.77,869.8 R44.1@-1344.57,870 ; v1(-1265,469.8) C47.1@-1204.17,469.8 -1204.17,644.17 -1344.57,784.57 R44.1@-1344.57,870 ; U4.16@-666.14,1080.31 -666.14,1053.86 -664,1051.72 -664,993 v1(-652,981) ; R10.1@-611.61,210.24 v1(-611.61,255)
  Bottom w4.5: FB1.1@-1365,154.68 -1365,175 -1400,210 -1400,315 -1265,450 v1(-1265,469.8) ; v1(-1305,869.8) -1275.2,840 -1116,840 -951,1005 -676,1005 v1(-652,981) -629.45,958.45 -629.45,739.45 -540,650 -540,326.61 v1(-611.61,255)
CLK_OUT_BUF: D6.1 FB20.2 U7.10 | length 575.4
  Top w4.5: v1(-2145,530) -2113.3,561.7 -2113.3,594.2 -2067.7,639.8 U7.10@-2038.39,639.8
  Bottom w4.5: FB20.2@-2215,154.69 -2215,170.01 -2145,240.01 v1(-2145,530)
CS_B: J7.2 R22.1 U4.10 | length 1370
  Top w4.5: R22.1@-1204.57,1765 -1205,1765 -1205,2015 J7.2@-1070,2150 ; v1(-775,1355) -778,1352 -778,1224 -746.12,1192.12 U4.10@-718.9,1192.13
  Bottom w4.5: v1(-1205,1810) -1204,1810 -1159,1765 -1040,1765 -895,1620 -895,1552 -750,1407 -750,1380 v1(-775,1355)
CS_B_IN: FB15.1 U15.5 | length 1913.7
  Top w4.5: v1(-1445,1715) U15.5@-1398.23,1715
  Bottom w4.5: FB15.1@-2065,154.68 -2065,370 -2045,390 -2045,695 -1860,880 -1860,1385 -1530,1715 v1(-1445,1715)
D1: R28.1 U17.4 | length 81.6
  Top w4.5: R28.1@-2011.61,325.24 -2009.64,327.2 U17.4@-1930.83,327.2
DGND: C36.2 C37.1 C38.1 C39.1 C40.1 C41.1 C42.1 C45.1 C46.1 C48.2 C49.2 C50.2 C51.2 C52.2 C53.2 FB10.2 J2.1 J6.1 J7.1 J11.1 R3.2 R30.1 U6.4 U7.7 U7.13 U8.4 U9.4 U10.4 U12.4 U15.7 U16.3 U16.4 U16.5 U17.3 U18.1 U18.4 | length 2357.4
  Top w10: v1(-1879.8,739.8) U7.7@-1824.84,739.8 ; U9.4@-1815.47,942.99 -1815.47,922.08 -1808.39,915 v1(-1770,915) ; U8.4@-1660.47,942.99 -1660.47,925.47 -1650,915 -1651,915 -1650.5,915.5 v1(-1649.5,915.5) ; U6.4@-1505.47,942.99 -1505.47,925.47 v1@-1495,915 ; v1(-1496,915.5) v1@-1495.5,915.5 ; U12.4@-1350.47,942.99 -1350.47,925 -1340.47,915 v1(-1340,915) ; U10.4@-1195.47,942.99 -1195.47,916 -1194.47,915 -1193,915 v1(-1192.5,915.5)
  Top w15: C50.2@-2141.3,439.8 -2141.3,420 -2126.3,405 v1(-2095,405) ; v1(-2095,510) -2074.8,489.8 U7.13@-2038.39,489.8 ; v1(-1916,1159.69) C51.2@-1880,1159.69 ; v1(-1890,230) -1874.05,214.05 C46.1@-1874.06,189.8 ; U17.3@-1832.4,327.2 v1(-1832.4,357.6) ; v1(-1764.69,1085) C49.2@-1764.69,1115 ; v1(-1735,2045) -1725.59,2035.59 U18.1@-1692.4,2035.59 ; U18.4@-1617.6,1984.41 -1584.41,1984.41 v1(-1575,1975) ; v1(-1614.69,1080) C48.2@-1614.69,1115 ; C45.1@-1534.06,274.8 v1(-1500.2,274.8) ; v1(-1454.69,1085) C53.2@-1454.69,1115 ; U15.7@-1398.23,1815 v1(-1350,1815) ; v1(-1299.69,1085) C52.2@-1299.69,1115 ; v1(-820,950) -820,998 -806.29,1011.71 C37.1@-806.3,1044.8 ; v1(-652.5,925.5) -652.5,926.5 -653,927 -581.93,927 -566.93,942 C39.1@-566.93,994.8 -546.73,1015 v1(-480,1015)
  Top w20: v1(-2159.57,1075) R3.2@-2159.57,1120 ; v1(-2159.57,1165) R3.2@-2159.57,1120 ; v1(-2120,1120) R3.2@-2159.57,1120 ; v1(-1737.56,1472.44) C36.2@-1737.56,1515 ; U16.5@-1576.77,490 v1(-1515,490) ; U16.3@-1363.23,440 v1(-1315,440) ; U16.4@-1363.23,490 v1(-1315,490) ; R30.1@-1214.57,390 v1(-1175,390)
  Bottom w15: v1(-820,950) -785.01,950 -762.01,927 -653,927 -652.5,926.5 v1(-652.5,925.5) ; C42.1@-544.69,1195 -544.68,1149.68 -480,1085 v1(-480,1015)
  Bottom w20: FB10.2@-1695,154.69 v1(-1695,190) ; v1(-1160,760) -1124,760 -934,950 v1(-820,950)
  other v1: -1295,-85 -1465,555 -1400,555 -1145,580 -1245,640 -1415,755 -925,1855 -515,1855 -1590,2080 -1370,2240 -480,2290
GND: C1.2 C6.1 C8.1 C9.1 C13.1 C15.1 C16.1 C17.1 C19.1 C20.1 D1.2 D2.3 D3.3 D4.3 D5.3 D6.3 D7.3 J4.1 J4.2 J10.3 J12.3 J13.3 R1.1 R3.1 R4.1 R36.2 R37.2 R38.2 R39.2 U3.2 U5.2 U11.2 | length 5505.8
  Top w15: v1(-2475,1305) C17.1@-2475,1350.32 ; v1(-2475,1585) C13.1@-2475,1625.32 ; v1(-2475,1860) C6.1@-2475,1895.32 ; v1(-2445,1634.8) U5.2@-2404.02,1634.8 ; v1(-2444.8,1359.8) U11.2@-2404.02,1359.8 ; v1(-2444.8,1904.8) U3.2@-2404.02,1904.8 ; v1(-2280,330) -2240,330 -2202.6,292.6 D7.3@-2179.92,292.6 ; v1(-2275,585) -2245,585 -2227.4,602.6 D6.3@-2199.92,602.6 ; v1(-2240,742.6) D5.3@-2199.92,742.6 ; v1(-2231.61,1311.61) C19.1@-2231.61,1340.12 ; v1(-2231.61,1585) C15.1@-2231.61,1615.12 ; v1(-2231.61,1856.61) C8.1@-2231.61,1885.12 ; v1(-2191.61,1310) C20.1@-2191.61,1340.12 ; v1(-2191.61,1585) C16.1@-2191.61,1615.12 ; v1(-2191.61,1856.61) C9.1@-2191.61,1885.12 ; v1(-1703,382) D2.3@-1663.31,382.01 ; v1(-1702,522) D3.3@-1663.31,522.01
  Top w20: v1(-2505,950) -2505,900 -2480.04,875.04 C1.2@-2480.04,874.96 ; v1(-2492.04,692.96) R4.1@-2492.05,744.8 ; C1.2@-2480.04,874.8 C1.2@-2480.04,874.96 ; v1(-2455,950) -2455,900 C1.2@-2480.04,874.96 ; v1(-2270,1120) R3.1@-2230.43,1120 ; v1(-2230.43,1075) R3.1@-2230.43,1120 ; v1(-2230.43,1165) R3.1@-2230.43,1120 ; v1(-2124.57,2395.43) R39.2@-2124.57,2450 ; v1(-2124.57,2499.57) R39.2@-2124.57,2450 ; v1(-2075,2450) R39.2@-2124.57,2450 ; v1(-1755,2222.44) D1.2@-1715,2222.44 ; v1(-1702,645) -1685,662 D4.3@-1663.31,662.01 ; v1(-404.77,2200.23) R1.1@-351.61,2200.23 ; v1(-351.61,2253.39) R1.1@-351.61,2200.23 ; v1(-350,2450) R38.2@-300.43,2450 ; v1(-300.43,2400.43) R38.2@-300.43,2450 ; v1(-300.43,2499.57) R38.2@-300.43,2450 ; v1(-300.23,2200.23) R1.1@-351.61,2200.23
  Top w30: R37.2@-2461.61,290.24 J4.2@-2461.61,424.8 ; v1(-2365,325) v1(-2365,290) -2365,245 -2210,90 -1760,90 -1730,120 v1(-1730,145) ; v1(-1730,175) v1(-1730,145) ; v1(-1324,230) v1(-1346,230) -1431,145 v1(-1730,145) ; v1(-50,260) -49.77,260.23 R36.2@3.39,260.24
  GND2 w8: -2461.61,393.25 J4.2@-2461.61,424.8 ; -2021.55,1485 J13.3@-1990,1485 ; -2021.55,1735 J12.3@-1990,1735 ; -2021.55,2010 J10.3@-1990,2010 ; -1990,1453.45 J13.3@-1990,1485 ; -1990,1516.55 J13.3@-1990,1485 ; -1990,1703.45 J12.3@-1990,1735 ; -1990,1766.55 J12.3@-1990,1735 ; -1990,1978.45 J10.3@-1990,2010 ; -1990,2041.55 J10.3@-1990,2010 ; -1958.45,1485 J13.3@-1990,1485 ; -1958.45,1735 J12.3@-1990,1735 ; -1958.45,2010 J10.3@-1990,2010
  Bottom w30: v1(-1730,145) v1(-1730,175) -1730,325 -1703,352 v1(-1703,382) -1702,383 v1(-1702,522) v1(-1702,645) ; v1(-1346,230) v1(-1324,230) -1320,230 -1235,315 -980,315 -780,115 -230,115 -85,260 v1(-50,260)
  other v1: -2320,1080 -2415,2100 -1990,2135 -2525,2200 -2070,2205 -1770,2445 -1970,2520 -1450,2520 -875,2520 -345,2520
I0: FB4.2 R6.1 R40.1 U4.20 U6.3 | length 2933.1
  Top w4.5: U6.3@-1525.16,942.99 -1525.16,895.59 R40.1@-1499.57,870 R40.1@-1499.77,869.8 ; v1(-1460,869.8) R40.1@-1499.77,869.8 ; v1(-1440,710) -1500,770 -1500,869.57 R40.1@-1499.77,869.8 ; U4.20@-587.4,1080.31 -587.4,1027.4 -585,1025 -585,1024 -584,1023 v1(-583,1023) ; v1(-260,210.23) R6.1@-211.61,210.24
  Bottom w4.5: v1(-1460,869.8) -1359.8,970 -1041,970 -957,1054 -614,1054 -585,1025 -585,1024 -578,1017 -578,768 -350,540 -350,235 -325.23,210.23 v1(-260,210.23) ; v1(-1440,710) -1430,700 -1430,195.01 -1415,180.01 FB4.2@-1415,154.69